# EAGLE board BMP384 Breakout-Panel (EAGLE 9.6.2), part 1 of 3
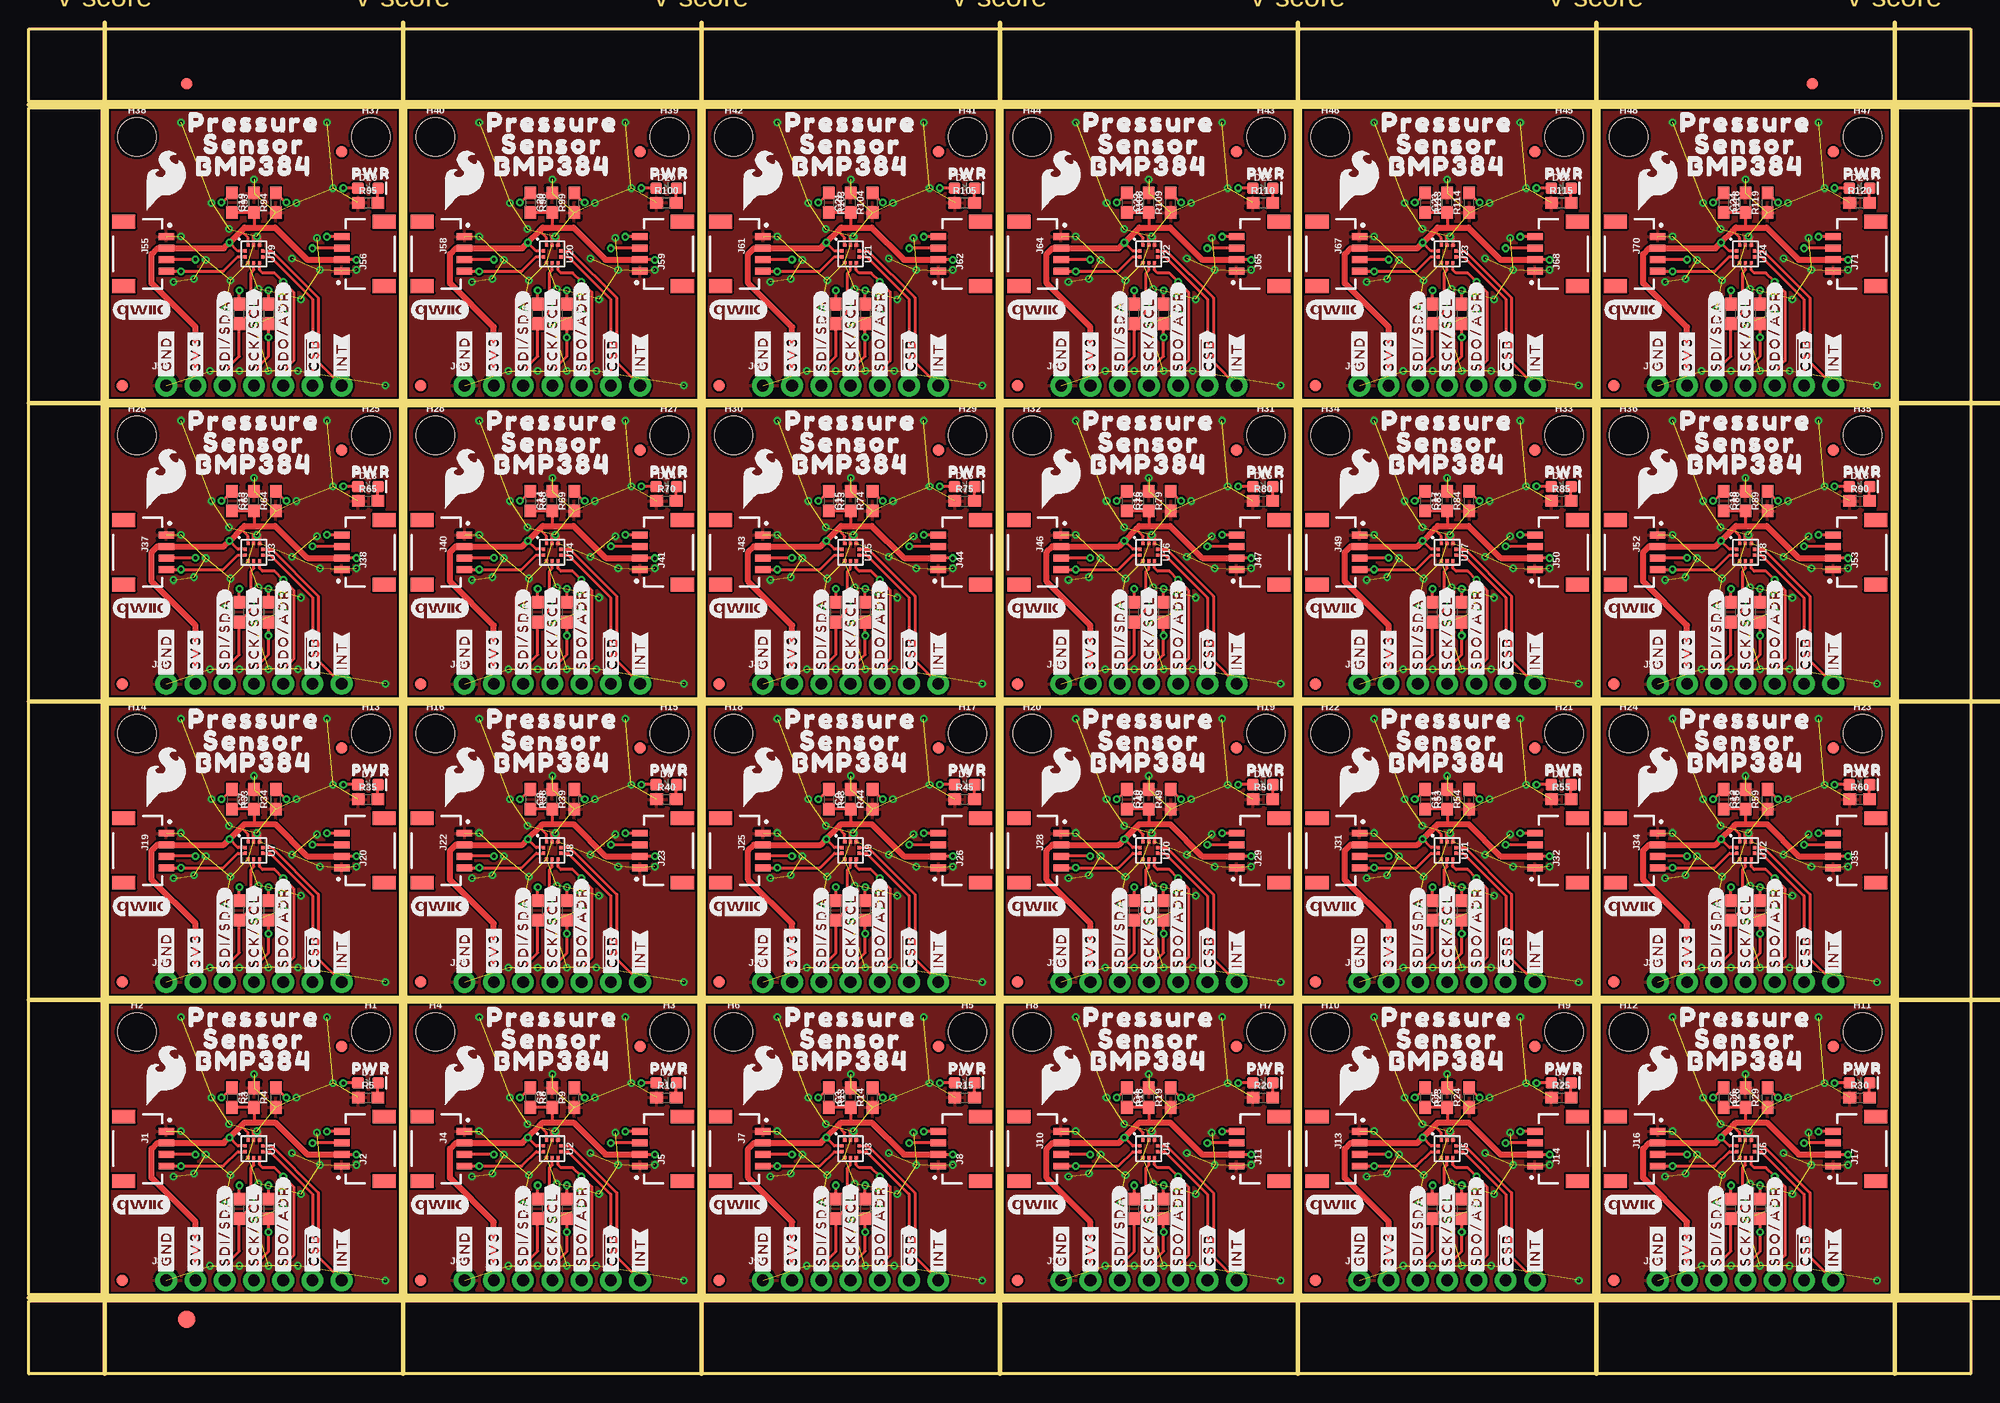
[diagram p0: board, top side]
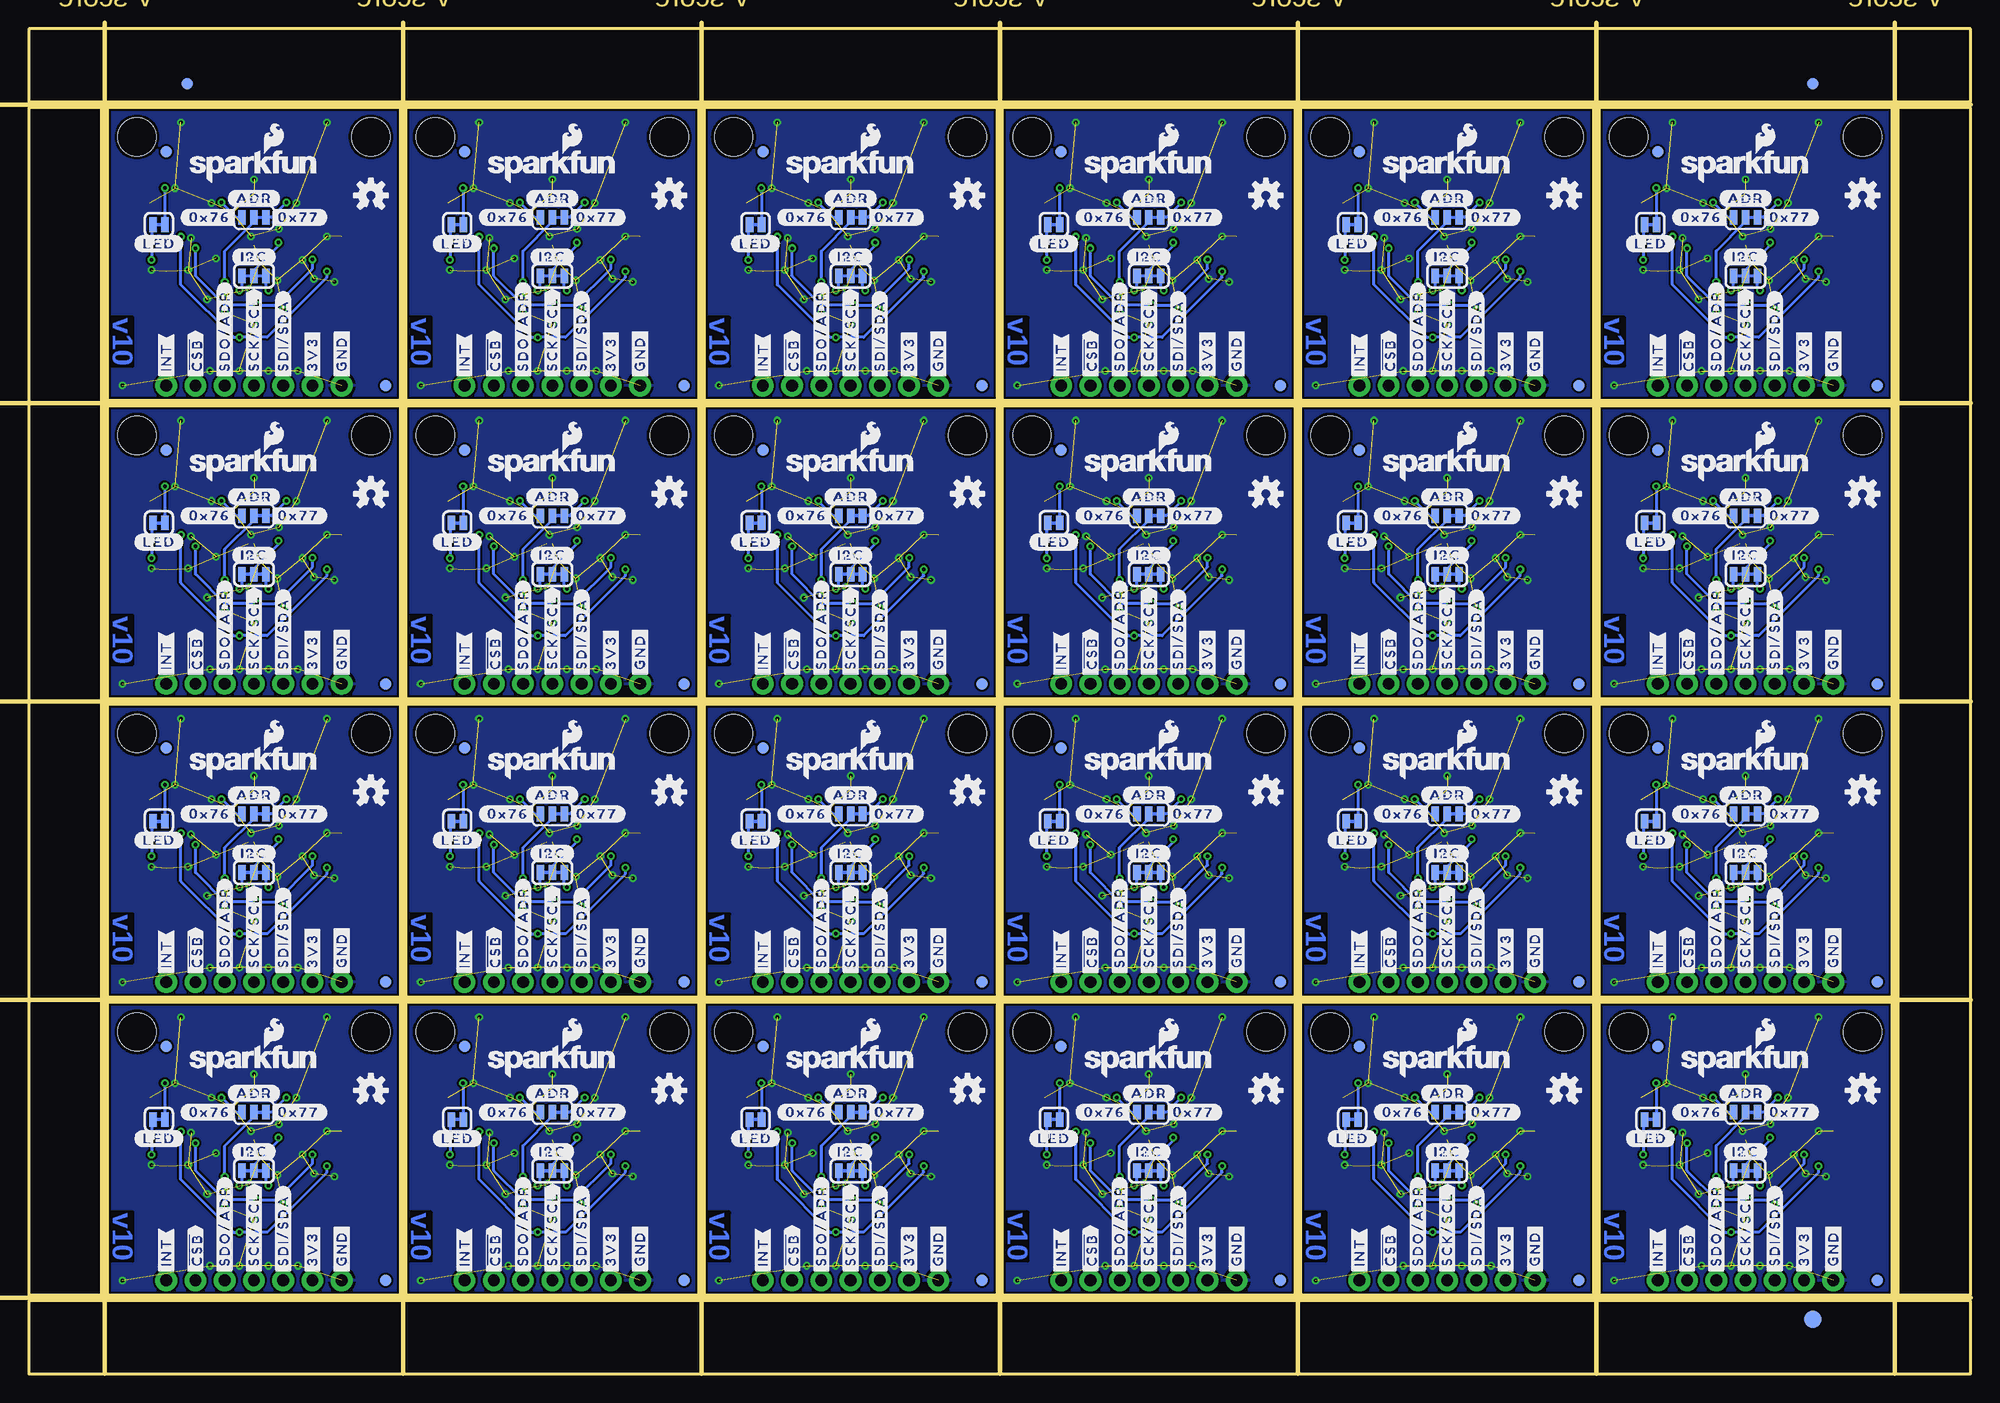
[diagram p1: board, bottom side, seen from below]

Size 168.66 x 116.84 mm. Coordinates in mm from the lower left corner, seen from the top.
Outline: 112 segments
Copper layers (1*16): Top 0.035mm / dielectric 1.5mm / Bottom 0.035mm
Design rules "BMP384 Breakout": minimum track width 7mil, minimum drill 0.3mm, track to track 7mil, track to pad 7mil, pad to pad 7mil, via to via 7mil, smd to smd 7mil, copper to edge 7mil, drill to drill 7mil, minimum pad ring 7mil, minimum via ring 7mil, stop-mask expansion 3mil, vias tented up to drill 25mil, thermal gap 10mil
tRestrict: area 18.7,18.7 to 18.8,18.9; area 20.3,20.2 to 20.4,20.4; area 19.7,20.2 to 19.8,20.4; area 44.6,18.7 to 44.7,18.9; area 46.2,20.2 to 46.4,20.4; area 45.6,20.2 to 45.7,20.4; area 70.5,18.7 to 70.6,18.9; area 72.1,20.2 to 72.3,20.4; area 71.5,20.2 to 71.6,20.4; area 96.4,18.7 to 96.5,18.9; area 98,20.2 to 98.2,20.4; area 97.4,20.2 to 97.5,20.4; 60 more areas
Milling: 12 lines

## Footprints (pad centres in the part's own frame; a part is rotated, then mirrored left to right if it is on the bottom)
0603 = smd 1.1 x 1: 1 -0.85,0; 2 0.85,0
LED-0603 = smd 1 x 1: A -0.877,0; C 0.877,0
FIDUCIAL-1X2 = smd 1 x 1: 1 0,0
FIDUCIAL-1.5X3 = smd 1.5 x 1.5: 1 0,0
STAND-OFF = hole 3.302: 0,0
JST04_1MM_RA = smd 0.6 x 1.35: 1 -1.5,0; 2 -0.5,0; 3 0.5,0; 4 1.5,0 | smd 1.2 x 2: NC1 2.8,-3.675; NC2 -2.8,-3.675
1X07_NO_SILK = drill 1.016 pad 1.88: 1 0,0; 2 2.54,0; 3 5.08,0; 4 7.62,0; 5 10.16,0; 6 12.7,0; 7 15.24,0
SMT-JUMPER_3_1-NC_TRACE_SILK = smd 0.66 x 1.27: 1 -1.041,0; 2 0,0; 3 1.041,0
SMT-JUMPER_3_2-NC_TRACE_SILK = smd 0.66 x 1.27: 1 -1.041,0; 2 0,0; 3 1.041,0
SMT-JUMPER_2_NC_TRACE_SILK = smd 0.66 x 1.27: 1 -0.521,0; 2 0.521,0
LGA-10 = smd 0.285 x 0.27: 1 0.25,0.757; 2 -0.25,0.757; 3 -0.757,0.5; 4 -0.757,0; 5 -0.757,-0.5; 6 -0.25,-0.757; 7 0.25,-0.757; 8 0.757,-0.5; 9 0.757,0; 10 0.757,0.5

## Placement (x,y rotation side)
C1  0.1uF  [0603]  19.56,24 90 top
C2  0.1uF  [0603]  45.47,24 90 top
C3  0.1uF  [0603]  71.37,24 90 top
C4  0.1uF  [0603]  97.28,24 90 top
C5  0.1uF  [0603]  123.19,24 90 top
C6  0.1uF  [0603]  149.1,24 90 top
C7  0.1uF  [0603]  19.56,49.91 90 top
C8  0.1uF  [0603]  45.47,49.91 90 top
C9  0.1uF  [0603]  71.37,49.91 90 top
C10  0.1uF  [0603]  97.28,49.91 90 top
C11  0.1uF  [0603]  123.19,49.91 90 top
C12  0.1uF  [0603]  149.1,49.91 90 top
C13  0.1uF  [0603]  19.56,75.82 90 top
C14  0.1uF  [0603]  45.47,75.82 90 top
C15  0.1uF  [0603]  71.37,75.82 90 top
C16  0.1uF  [0603]  97.28,75.82 90 top
C17  0.1uF  [0603]  123.19,75.82 90 top
C18  0.1uF  [0603]  149.1,75.82 90 top
C19  0.1uF  [0603]  19.56,101.73 90 top
C20  0.1uF  [0603]  45.47,101.73 90 top
C21  0.1uF  [0603]  71.37,101.73 90 top
C22  0.1uF  [0603]  97.28,101.73 90 top
C23  0.1uF  [0603]  123.19,101.73 90 top
C24  0.1uF  [0603]  149.1,101.73 90 top
D1  RED  [LED-0603]  29.46,25.27 0 top
D2  RED  [LED-0603]  55.37,25.27 0 top
D3  RED  [LED-0603]  81.28,25.27 0 top
D4  RED  [LED-0603]  107.19,25.27 0 top
D5  RED  [LED-0603]  133.1,25.27 0 top
D6  RED  [LED-0603]  159,25.27 0 top
D7  RED  [LED-0603]  29.46,51.18 0 top
D8  RED  [LED-0603]  55.37,51.18 0 top
D9  RED  [LED-0603]  81.28,51.18 0 top
D10  RED  [LED-0603]  107.19,51.18 0 top
D11  RED  [LED-0603]  133.1,51.18 0 top
D12  RED  [LED-0603]  159,51.18 0 top
D13  RED  [LED-0603]  29.46,77.09 0 top
D14  RED  [LED-0603]  55.37,77.09 0 top
D15  RED  [LED-0603]  81.28,77.09 0 top
D16  RED  [LED-0603]  107.19,77.09 0 top
D17  RED  [LED-0603]  133.1,77.09 0 top
D18  RED  [LED-0603]  159,77.09 0 top
D19  RED  [LED-0603]  29.46,103 0 top
D20  RED  [LED-0603]  55.37,103 0 top
D21  RED  [LED-0603]  81.28,103 0 top
D22  RED  [LED-0603]  107.19,103 0 top
D23  RED  [LED-0603]  133.1,103 0 top
D24  RED  [LED-0603]  159,103 0 top
E$1  [FIDUCIAL-1X2]  13.72,112.08 0 top
E$2  [FIDUCIAL-1X2]  13.72,112.08 0 bottom
E$3  [FIDUCIAL-1X2]  154.88,112.08 0 top
E$4  [FIDUCIAL-1X2]  154.88,112.08 0 bottom
E$5  [FIDUCIAL-1.5X3]  13.72,4.76 0 top
E$6  [FIDUCIAL-1.5X3]  13.72,4.76 0 bottom
FD1  FIDUCIAL1X2  [FIDUCIAL-1X2]  8.13,8.13 0 top
FD2  FIDUCIAL1X2  [FIDUCIAL-1X2]  8.13,8.13 0 bottom
FD3  FIDUCIAL1X2  [FIDUCIAL-1X2]  27.18,28.45 0 top
FD4  FIDUCIAL1X2  [FIDUCIAL-1X2]  27.18,28.45 0 bottom
FD5  FIDUCIAL1X2  [FIDUCIAL-1X2]  34.04,8.13 0 top
FD6  FIDUCIAL1X2  [FIDUCIAL-1X2]  34.04,8.13 0 bottom
FD7  FIDUCIAL1X2  [FIDUCIAL-1X2]  53.09,28.45 0 top
FD8  FIDUCIAL1X2  [FIDUCIAL-1X2]  53.09,28.45 0 bottom
FD9  FIDUCIAL1X2  [FIDUCIAL-1X2]  59.94,8.13 0 top
FD10  FIDUCIAL1X2  [FIDUCIAL-1X2]  59.94,8.13 0 bottom
FD11  FIDUCIAL1X2  [FIDUCIAL-1X2]  78.99,28.45 0 top
FD12  FIDUCIAL1X2  [FIDUCIAL-1X2]  78.99,28.45 0 bottom
FD13  FIDUCIAL1X2  [FIDUCIAL-1X2]  85.85,8.13 0 top
FD14  FIDUCIAL1X2  [FIDUCIAL-1X2]  85.85,8.13 0 bottom
FD15  FIDUCIAL1X2  [FIDUCIAL-1X2]  104.9,28.45 0 top
FD16  FIDUCIAL1X2  [FIDUCIAL-1X2]  104.9,28.45 0 bottom
FD17  FIDUCIAL1X2  [FIDUCIAL-1X2]  111.76,8.13 0 top
FD18  FIDUCIAL1X2  [FIDUCIAL-1X2]  111.76,8.13 0 bottom
FD19  FIDUCIAL1X2  [FIDUCIAL-1X2]  130.81,28.45 0 top
FD20  FIDUCIAL1X2  [FIDUCIAL-1X2]  130.81,28.45 0 bottom
FD21  FIDUCIAL1X2  [FIDUCIAL-1X2]  137.67,8.13 0 top
FD22  FIDUCIAL1X2  [FIDUCIAL-1X2]  137.67,8.13 0 bottom
FD23  FIDUCIAL1X2  [FIDUCIAL-1X2]  156.72,28.45 0 top
FD24  FIDUCIAL1X2  [FIDUCIAL-1X2]  156.72,28.45 0 bottom
FD25  FIDUCIAL1X2  [FIDUCIAL-1X2]  8.13,34.04 0 top
FD26  FIDUCIAL1X2  [FIDUCIAL-1X2]  8.13,34.04 0 bottom
FD27  FIDUCIAL1X2  [FIDUCIAL-1X2]  27.18,54.36 0 top
FD28  FIDUCIAL1X2  [FIDUCIAL-1X2]  27.18,54.36 0 bottom
FD29  FIDUCIAL1X2  [FIDUCIAL-1X2]  34.04,34.04 0 top
FD30  FIDUCIAL1X2  [FIDUCIAL-1X2]  34.04,34.04 0 bottom
FD31  FIDUCIAL1X2  [FIDUCIAL-1X2]  53.09,54.36 0 top
FD32  FIDUCIAL1X2  [FIDUCIAL-1X2]  53.09,54.36 0 bottom
FD33  FIDUCIAL1X2  [FIDUCIAL-1X2]  59.94,34.04 0 top
FD34  FIDUCIAL1X2  [FIDUCIAL-1X2]  59.94,34.04 0 bottom
FD35  FIDUCIAL1X2  [FIDUCIAL-1X2]  78.99,54.36 0 top
FD36  FIDUCIAL1X2  [FIDUCIAL-1X2]  78.99,54.36 0 bottom
FD37  FIDUCIAL1X2  [FIDUCIAL-1X2]  85.85,34.04 0 top
FD38  FIDUCIAL1X2  [FIDUCIAL-1X2]  85.85,34.04 0 bottom
FD39  FIDUCIAL1X2  [FIDUCIAL-1X2]  104.9,54.36 0 top
FD40  FIDUCIAL1X2  [FIDUCIAL-1X2]  104.9,54.36 0 bottom
FD41  FIDUCIAL1X2  [FIDUCIAL-1X2]  111.76,34.04 0 top
FD42  FIDUCIAL1X2  [FIDUCIAL-1X2]  111.76,34.04 0 bottom
FD43  FIDUCIAL1X2  [FIDUCIAL-1X2]  130.81,54.36 0 top
FD44  FIDUCIAL1X2  [FIDUCIAL-1X2]  130.81,54.36 0 bottom
FD45  FIDUCIAL1X2  [FIDUCIAL-1X2]  137.67,34.04 0 top
FD46  FIDUCIAL1X2  [FIDUCIAL-1X2]  137.67,34.04 0 bottom
FD47  FIDUCIAL1X2  [FIDUCIAL-1X2]  156.72,54.36 0 top
FD48  FIDUCIAL1X2  [FIDUCIAL-1X2]  156.72,54.36 0 bottom
FD49  FIDUCIAL1X2  [FIDUCIAL-1X2]  8.13,59.94 0 top
FD50  FIDUCIAL1X2  [FIDUCIAL-1X2]  8.13,59.94 0 bottom
FD51  FIDUCIAL1X2  [FIDUCIAL-1X2]  27.18,80.26 0 top
FD52  FIDUCIAL1X2  [FIDUCIAL-1X2]  27.18,80.26 0 bottom
FD53  FIDUCIAL1X2  [FIDUCIAL-1X2]  34.04,59.94 0 top
FD54  FIDUCIAL1X2  [FIDUCIAL-1X2]  34.04,59.94 0 bottom
FD55  FIDUCIAL1X2  [FIDUCIAL-1X2]  53.09,80.26 0 top
FD56  FIDUCIAL1X2  [FIDUCIAL-1X2]  53.09,80.26 0 bottom
FD57  FIDUCIAL1X2  [FIDUCIAL-1X2]  59.94,59.94 0 top
FD58  FIDUCIAL1X2  [FIDUCIAL-1X2]  59.94,59.94 0 bottom
FD59  FIDUCIAL1X2  [FIDUCIAL-1X2]  78.99,80.26 0 top
FD60  FIDUCIAL1X2  [FIDUCIAL-1X2]  78.99,80.26 0 bottom
FD61  FIDUCIAL1X2  [FIDUCIAL-1X2]  85.85,59.94 0 top
FD62  FIDUCIAL1X2  [FIDUCIAL-1X2]  85.85,59.94 0 bottom
FD63  FIDUCIAL1X2  [FIDUCIAL-1X2]  104.9,80.26 0 top
FD64  FIDUCIAL1X2  [FIDUCIAL-1X2]  104.9,80.26 0 bottom
FD65  FIDUCIAL1X2  [FIDUCIAL-1X2]  111.76,59.94 0 top
FD66  FIDUCIAL1X2  [FIDUCIAL-1X2]  111.76,59.94 0 bottom
FD67  FIDUCIAL1X2  [FIDUCIAL-1X2]  130.81,80.26 0 top
FD68  FIDUCIAL1X2  [FIDUCIAL-1X2]  130.81,80.26 0 bottom
FD69  FIDUCIAL1X2  [FIDUCIAL-1X2]  137.67,59.94 0 top
FD70  FIDUCIAL1X2  [FIDUCIAL-1X2]  137.67,59.94 0 bottom
FD71  FIDUCIAL1X2  [FIDUCIAL-1X2]  156.72,80.26 0 top
FD72  FIDUCIAL1X2  [FIDUCIAL-1X2]  156.72,80.26 0 bottom
FD73  FIDUCIAL1X2  [FIDUCIAL-1X2]  8.13,85.85 0 top
FD74  FIDUCIAL1X2  [FIDUCIAL-1X2]  8.13,85.85 0 bottom
FD75  FIDUCIAL1X2  [FIDUCIAL-1X2]  27.18,106.17 0 top
FD76  FIDUCIAL1X2  [FIDUCIAL-1X2]  27.18,106.17 0 bottom
FD77  FIDUCIAL1X2  [FIDUCIAL-1X2]  34.04,85.85 0 top
FD78  FIDUCIAL1X2  [FIDUCIAL-1X2]  34.04,85.85 0 bottom
FD79  FIDUCIAL1X2  [FIDUCIAL-1X2]  53.09,106.17 0 top
FD80  FIDUCIAL1X2  [FIDUCIAL-1X2]  53.09,106.17 0 bottom
FD81  FIDUCIAL1X2  [FIDUCIAL-1X2]  59.94,85.85 0 top
FD82  FIDUCIAL1X2  [FIDUCIAL-1X2]  59.94,85.85 0 bottom
FD83  FIDUCIAL1X2  [FIDUCIAL-1X2]  78.99,106.17 0 top
FD84  FIDUCIAL1X2  [FIDUCIAL-1X2]  78.99,106.17 0 bottom
FD85  FIDUCIAL1X2  [FIDUCIAL-1X2]  85.85,85.85 0 top
FD86  FIDUCIAL1X2  [FIDUCIAL-1X2]  85.85,85.85 0 bottom
FD87  FIDUCIAL1X2  [FIDUCIAL-1X2]  104.9,106.17 0 top
FD88  FIDUCIAL1X2  [FIDUCIAL-1X2]  104.9,106.17 0 bottom
FD89  FIDUCIAL1X2  [FIDUCIAL-1X2]  111.76,85.85 0 top
FD90  FIDUCIAL1X2  [FIDUCIAL-1X2]  111.76,85.85 0 bottom
FD91  FIDUCIAL1X2  [FIDUCIAL-1X2]  130.81,106.17 0 top
FD92  FIDUCIAL1X2  [FIDUCIAL-1X2]  130.81,106.17 0 bottom
FD93  FIDUCIAL1X2  [FIDUCIAL-1X2]  137.67,85.85 0 top
FD94  FIDUCIAL1X2  [FIDUCIAL-1X2]  137.67,85.85 0 bottom
FD95  FIDUCIAL1X2  [FIDUCIAL-1X2]  156.72,106.17 0 top
FD96  FIDUCIAL1X2  [FIDUCIAL-1X2]  156.72,106.17 0 bottom
H1  STAND-OFF  [STAND-OFF]  29.72,29.72 0 top
H2  STAND-OFF  [STAND-OFF]  9.4,29.72 0 top
H3  STAND-OFF  [STAND-OFF]  55.63,29.72 0 top
H4  STAND-OFF  [STAND-OFF]  35.31,29.72 0 top
H5  STAND-OFF  [STAND-OFF]  81.53,29.72 0 top
H6  STAND-OFF  [STAND-OFF]  61.21,29.72 0 top
H7  STAND-OFF  [STAND-OFF]  107.44,29.72 0 top
H8  STAND-OFF  [STAND-OFF]  87.12,29.72 0 top
H9  STAND-OFF  [STAND-OFF]  133.35,29.72 0 top
H10  STAND-OFF  [STAND-OFF]  113.03,29.72 0 top
H11  STAND-OFF  [STAND-OFF]  159.26,29.72 0 top
H12  STAND-OFF  [STAND-OFF]  138.94,29.72 0 top
H13  STAND-OFF  [STAND-OFF]  29.72,55.63 0 top
H14  STAND-OFF  [STAND-OFF]  9.4,55.63 0 top
H15  STAND-OFF  [STAND-OFF]  55.63,55.63 0 top
H16  STAND-OFF  [STAND-OFF]  35.31,55.63 0 top
H17  STAND-OFF  [STAND-OFF]  81.53,55.63 0 top
H18  STAND-OFF  [STAND-OFF]  61.21,55.63 0 top
H19  STAND-OFF  [STAND-OFF]  107.44,55.63 0 top
H20  STAND-OFF  [STAND-OFF]  87.12,55.63 0 top
H21  STAND-OFF  [STAND-OFF]  133.35,55.63 0 top
H22  STAND-OFF  [STAND-OFF]  113.03,55.63 0 top
H23  STAND-OFF  [STAND-OFF]  159.26,55.63 0 top
H24  STAND-OFF  [STAND-OFF]  138.94,55.63 0 top
H25  STAND-OFF  [STAND-OFF]  29.72,81.53 0 top
H26  STAND-OFF  [STAND-OFF]  9.4,81.53 0 top
H27  STAND-OFF  [STAND-OFF]  55.63,81.53 0 top
H28  STAND-OFF  [STAND-OFF]  35.31,81.53 0 top
H29  STAND-OFF  [STAND-OFF]  81.53,81.53 0 top
H30  STAND-OFF  [STAND-OFF]  61.21,81.53 0 top
H31  STAND-OFF  [STAND-OFF]  107.44,81.53 0 top
H32  STAND-OFF  [STAND-OFF]  87.12,81.53 0 top
H33  STAND-OFF  [STAND-OFF]  133.35,81.53 0 top
H34  STAND-OFF  [STAND-OFF]  113.03,81.53 0 top
H35  STAND-OFF  [STAND-OFF]  159.26,81.53 0 top
H36  STAND-OFF  [STAND-OFF]  138.94,81.53 0 top
H37  STAND-OFF  [STAND-OFF]  29.72,107.44 0 top
H38  STAND-OFF  [STAND-OFF]  9.4,107.44 0 top
H39  STAND-OFF  [STAND-OFF]  55.63,107.44 0 top
H40  STAND-OFF  [STAND-OFF]  35.31,107.44 0 top
H41  STAND-OFF  [STAND-OFF]  81.53,107.44 0 top
H42  STAND-OFF  [STAND-OFF]  61.21,107.44 0 top
H43  STAND-OFF  [STAND-OFF]  107.44,107.44 0 top
H44  STAND-OFF  [STAND-OFF]  87.12,107.44 0 top
H45  STAND-OFF  [STAND-OFF]  133.35,107.44 0 top
H46  STAND-OFF  [STAND-OFF]  113.03,107.44 0 top
H47  STAND-OFF  [STAND-OFF]  159.26,107.44 0 top
H48  STAND-OFF  [STAND-OFF]  138.94,107.44 0 top
J1  QWIIC_RIGHT_ANGLE  [JST04_1MM_RA]  11.94,19.56 270 top
J2  QWIIC_RIGHT_ANGLE  [JST04_1MM_RA]  27.18,19.56 90 top
J3  [1X07_NO_SILK]  11.94,8.13 0 top
J4  QWIIC_RIGHT_ANGLE  [JST04_1MM_RA]  37.85,19.56 270 top
J5  QWIIC_RIGHT_ANGLE  [JST04_1MM_RA]  53.09,19.56 90 top
J6  [1X07_NO_SILK]  37.85,8.13 0 top
J7  QWIIC_RIGHT_ANGLE  [JST04_1MM_RA]  63.75,19.56 270 top
J8  QWIIC_RIGHT_ANGLE  [JST04_1MM_RA]  78.99,19.56 90 top
J9  [1X07_NO_SILK]  63.75,8.13 0 top
J10  QWIIC_RIGHT_ANGLE  [JST04_1MM_RA]  89.66,19.56 270 top
J11  QWIIC_RIGHT_ANGLE  [JST04_1MM_RA]  104.9,19.56 90 top
J12  [1X07_NO_SILK]  89.66,8.13 0 top
J13  QWIIC_RIGHT_ANGLE  [JST04_1MM_RA]  115.57,19.56 270 top
J14  QWIIC_RIGHT_ANGLE  [JST04_1MM_RA]  130.81,19.56 90 top
J15  [1X07_NO_SILK]  115.57,8.13 0 top
J16  QWIIC_RIGHT_ANGLE  [JST04_1MM_RA]  141.48,19.56 270 top
J17  QWIIC_RIGHT_ANGLE  [JST04_1MM_RA]  156.72,19.56 90 top
J18  [1X07_NO_SILK]  141.48,8.13 0 top
J19  QWIIC_RIGHT_ANGLE  [JST04_1MM_RA]  11.94,45.47 270 top
J20  QWIIC_RIGHT_ANGLE  [JST04_1MM_RA]  27.18,45.47 90 top
J21  [1X07_NO_SILK]  11.94,34.04 0 top
J22  QWIIC_RIGHT_ANGLE  [JST04_1MM_RA]  37.85,45.47 270 top
J23  QWIIC_RIGHT_ANGLE  [JST04_1MM_RA]  53.09,45.47 90 top
J24  [1X07_NO_SILK]  37.85,34.04 0 top
J25  QWIIC_RIGHT_ANGLE  [JST04_1MM_RA]  63.75,45.47 270 top
J26  QWIIC_RIGHT_ANGLE  [JST04_1MM_RA]  78.99,45.47 90 top
J27  [1X07_NO_SILK]  63.75,34.04 0 top
J28  QWIIC_RIGHT_ANGLE  [JST04_1MM_RA]  89.66,45.47 270 top
J29  QWIIC_RIGHT_ANGLE  [JST04_1MM_RA]  104.9,45.47 90 top
J30  [1X07_NO_SILK]  89.66,34.04 0 top
J31  QWIIC_RIGHT_ANGLE  [JST04_1MM_RA]  115.57,45.47 270 top
J32  QWIIC_RIGHT_ANGLE  [JST04_1MM_RA]  130.81,45.47 90 top
J33  [1X07_NO_SILK]  115.57,34.04 0 top
J34  QWIIC_RIGHT_ANGLE  [JST04_1MM_RA]  141.48,45.47 270 top
J35  QWIIC_RIGHT_ANGLE  [JST04_1MM_RA]  156.72,45.47 90 top
J36  [1X07_NO_SILK]  141.48,34.04 0 top
J37  QWIIC_RIGHT_ANGLE  [JST04_1MM_RA]  11.94,71.37 270 top
J38  QWIIC_RIGHT_ANGLE  [JST04_1MM_RA]  27.18,71.37 90 top
J39  [1X07_NO_SILK]  11.94,59.94 0 top
J40  QWIIC_RIGHT_ANGLE  [JST04_1MM_RA]  37.85,71.37 270 top
J41  QWIIC_RIGHT_ANGLE  [JST04_1MM_RA]  53.09,71.37 90 top
J42  [1X07_NO_SILK]  37.85,59.94 0 top
J43  QWIIC_RIGHT_ANGLE  [JST04_1MM_RA]  63.75,71.37 270 top
J44  QWIIC_RIGHT_ANGLE  [JST04_1MM_RA]  78.99,71.37 90 top
J45  [1X07_NO_SILK]  63.75,59.94 0 top
J46  QWIIC_RIGHT_ANGLE  [JST04_1MM_RA]  89.66,71.37 270 top
J47  QWIIC_RIGHT_ANGLE  [JST04_1MM_RA]  104.9,71.37 90 top
J48  [1X07_NO_SILK]  89.66,59.94 0 top
J49  QWIIC_RIGHT_ANGLE  [JST04_1MM_RA]  115.57,71.37 270 top
J50  QWIIC_RIGHT_ANGLE  [JST04_1MM_RA]  130.81,71.37 90 top
J51  [1X07_NO_SILK]  115.57,59.94 0 top
J52  QWIIC_RIGHT_ANGLE  [JST04_1MM_RA]  141.48,71.37 270 top
J53  QWIIC_RIGHT_ANGLE  [JST04_1MM_RA]  156.72,71.37 90 top
J54  [1X07_NO_SILK]  141.48,59.94 0 top
J55  QWIIC_RIGHT_ANGLE  [JST04_1MM_RA]  11.94,97.28 270 top
J56  QWIIC_RIGHT_ANGLE  [JST04_1MM_RA]  27.18,97.28 90 top
J57  [1X07_NO_SILK]  11.94,85.85 0 top
J58  QWIIC_RIGHT_ANGLE  [JST04_1MM_RA]  37.85,97.28 270 top
J59  QWIIC_RIGHT_ANGLE  [JST04_1MM_RA]  53.09,97.28 90 top
J60  [1X07_NO_SILK]  37.85,85.85 0 top
J61  QWIIC_RIGHT_ANGLE  [JST04_1MM_RA]  63.75,97.28 270 top
J62  QWIIC_RIGHT_ANGLE  [JST04_1MM_RA]  78.99,97.28 90 top
J63  [1X07_NO_SILK]  63.75,85.85 0 top
J64  QWIIC_RIGHT_ANGLE  [JST04_1MM_RA]  89.66,97.28 270 top
J65  QWIIC_RIGHT_ANGLE  [JST04_1MM_RA]  104.9,97.28 90 top
J66  [1X07_NO_SILK]  89.66,85.85 0 top
J67  QWIIC_RIGHT_ANGLE  [JST04_1MM_RA]  115.57,97.28 270 top
J68  QWIIC_RIGHT_ANGLE  [JST04_1MM_RA]  130.81,97.28 90 top
J69  [1X07_NO_SILK]  115.57,85.85 0 top
J70  QWIIC_RIGHT_ANGLE  [JST04_1MM_RA]  141.48,97.28 270 top
J71  QWIIC_RIGHT_ANGLE  [JST04_1MM_RA]  156.72,97.28 90 top
J72  [1X07_NO_SILK]  141.48,85.85 0 top
JP1  ADR  [SMT-JUMPER_3_1-NC_TRACE_SILK]  19.56,22.73 0 bottom
JP2  I2C  [SMT-JUMPER_3_2-NC_TRACE_SILK]  19.56,17.65 0 bottom
JP3  LED  [SMT-JUMPER_2_NC_TRACE_SILK]  27.81,22.1 180 bottom
JP4  ADR  [SMT-JUMPER_3_1-NC_TRACE_SILK]  45.47,22.73 0 bottom
JP5  I2C  [SMT-JUMPER_3_2-NC_TRACE_SILK]  45.47,17.65 0 bottom
JP6  LED  [SMT-JUMPER_2_NC_TRACE_SILK]  53.72,22.1 180 bottom
JP7  ADR  [SMT-JUMPER_3_1-NC_TRACE_SILK]  71.37,22.73 0 bottom
JP8  I2C  [SMT-JUMPER_3_2-NC_TRACE_SILK]  71.37,17.65 0 bottom
JP9  LED  [SMT-JUMPER_2_NC_TRACE_SILK]  79.63,22.1 180 bottom
JP10  ADR  [SMT-JUMPER_3_1-NC_TRACE_SILK]  97.28,22.73 0 bottom
JP11  I2C  [SMT-JUMPER_3_2-NC_TRACE_SILK]  97.28,17.65 0 bottom
JP12  LED  [SMT-JUMPER_2_NC_TRACE_SILK]  105.54,22.1 180 bottom
JP13  ADR  [SMT-JUMPER_3_1-NC_TRACE_SILK]  123.19,22.73 0 bottom
JP14  I2C  [SMT-JUMPER_3_2-NC_TRACE_SILK]  123.19,17.65 0 bottom
JP15  LED  [SMT-JUMPER_2_NC_TRACE_SILK]  131.44,22.1 180 bottom
JP16  ADR  [SMT-JUMPER_3_1-NC_TRACE_SILK]  149.1,22.73 0 bottom
JP17  I2C  [SMT-JUMPER_3_2-NC_TRACE_SILK]  149.1,17.65 0 bottom
JP18  LED  [SMT-JUMPER_2_NC_TRACE_SILK]  157.35,22.1 180 bottom
JP19  ADR  [SMT-JUMPER_3_1-NC_TRACE_SILK]  19.56,48.64 0 bottom
JP20  I2C  [SMT-JUMPER_3_2-NC_TRACE_SILK]  19.56,43.56 0 bottom
JP21  LED  [SMT-JUMPER_2_NC_TRACE_SILK]  27.81,48.01 180 bottom
JP22  ADR  [SMT-JUMPER_3_1-NC_TRACE_SILK]  45.47,48.64 0 bottom
JP23  I2C  [SMT-JUMPER_3_2-NC_TRACE_SILK]  45.47,43.56 0 bottom
JP24  LED  [SMT-JUMPER_2_NC_TRACE_SILK]  53.72,48.01 180 bottom
JP25  ADR  [SMT-JUMPER_3_1-NC_TRACE_SILK]  71.37,48.64 0 bottom
JP26  I2C  [SMT-JUMPER_3_2-NC_TRACE_SILK]  71.37,43.56 0 bottom
JP27  LED  [SMT-JUMPER_2_NC_TRACE_SILK]  79.63,48.01 180 bottom
JP28  ADR  [SMT-JUMPER_3_1-NC_TRACE_SILK]  97.28,48.64 0 bottom
JP29  I2C  [SMT-JUMPER_3_2-NC_TRACE_SILK]  97.28,43.56 0 bottom
JP30  LED  [SMT-JUMPER_2_NC_TRACE_SILK]  105.54,48.01 180 bottom
JP31  ADR  [SMT-JUMPER_3_1-NC_TRACE_SILK]  123.19,48.64 0 bottom
JP32  I2C  [SMT-JUMPER_3_2-NC_TRACE_SILK]  123.19,43.56 0 bottom
JP33  LED  [SMT-JUMPER_2_NC_TRACE_SILK]  131.44,48.01 180 bottom
JP34  ADR  [SMT-JUMPER_3_1-NC_TRACE_SILK]  149.1,48.64 0 bottom
JP35  I2C  [SMT-JUMPER_3_2-NC_TRACE_SILK]  149.1,43.56 0 bottom
JP36  LED  [SMT-JUMPER_2_NC_TRACE_SILK]  157.35,48.01 180 bottom
JP37  ADR  [SMT-JUMPER_3_1-NC_TRACE_SILK]  19.56,74.55 0 bottom
JP38  I2C  [SMT-JUMPER_3_2-NC_TRACE_SILK]  19.56,69.47 0 bottom
JP39  LED  [SMT-JUMPER_2_NC_TRACE_SILK]  27.81,73.91 180 bottom
JP40  ADR  [SMT-JUMPER_3_1-NC_TRACE_SILK]  45.47,74.55 0 bottom
JP41  I2C  [SMT-JUMPER_3_2-NC_TRACE_SILK]  45.47,69.47 0 bottom
JP42  LED  [SMT-JUMPER_2_NC_TRACE_SILK]  53.72,73.91 180 bottom
JP43  ADR  [SMT-JUMPER_3_1-NC_TRACE_SILK]  71.37,74.55 0 bottom
JP44  I2C  [SMT-JUMPER_3_2-NC_TRACE_SILK]  71.37,69.47 0 bottom
JP45  LED  [SMT-JUMPER_2_NC_TRACE_SILK]  79.63,73.91 180 bottom
JP46  ADR  [SMT-JUMPER_3_1-NC_TRACE_SILK]  97.28,74.55 0 bottom
JP47  I2C  [SMT-JUMPER_3_2-NC_TRACE_SILK]  97.28,69.47 0 bottom
JP48  LED  [SMT-JUMPER_2_NC_TRACE_SILK]  105.54,73.91 180 bottom
JP49  ADR  [SMT-JUMPER_3_1-NC_TRACE_SILK]  123.19,74.55 0 bottom
JP50  I2C  [SMT-JUMPER_3_2-NC_TRACE_SILK]  123.19,69.47 0 bottom
JP51  LED  [SMT-JUMPER_2_NC_TRACE_SILK]  131.44,73.91 180 bottom
JP52  ADR  [SMT-JUMPER_3_1-NC_TRACE_SILK]  149.1,74.55 0 bottom
JP53  I2C  [SMT-JUMPER_3_2-NC_TRACE_SILK]  149.1,69.47 0 bottom
JP54  LED  [SMT-JUMPER_2_NC_TRACE_SILK]  157.35,73.91 180 bottom
JP55  ADR  [SMT-JUMPER_3_1-NC_TRACE_SILK]  19.56,100.46 0 bottom
JP56  I2C  [SMT-JUMPER_3_2-NC_TRACE_SILK]  19.56,95.38 0 bottom
JP57  LED  [SMT-JUMPER_2_NC_TRACE_SILK]  27.81,99.82 180 bottom
JP58  ADR  [SMT-JUMPER_3_1-NC_TRACE_SILK]  45.47,100.46 0 bottom
JP59  I2C  [SMT-JUMPER_3_2-NC_TRACE_SILK]  45.47,95.38 0 bottom
JP60  LED  [SMT-JUMPER_2_NC_TRACE_SILK]  53.72,99.82 180 bottom
JP61  ADR  [SMT-JUMPER_3_1-NC_TRACE_SILK]  71.37,100.46 0 bottom
JP62  I2C  [SMT-JUMPER_3_2-NC_TRACE_SILK]  71.37,95.38 0 bottom
JP63  LED  [SMT-JUMPER_2_NC_TRACE_SILK]  79.63,99.82 180 bottom
JP64  ADR  [SMT-JUMPER_3_1-NC_TRACE_SILK]  97.28,100.46 0 bottom
JP65  I2C  [SMT-JUMPER_3_2-NC_TRACE_SILK]  97.28,95.38 0 bottom
JP66  LED  [SMT-JUMPER_2_NC_TRACE_SILK]  105.54,99.82 180 bottom
JP67  ADR  [SMT-JUMPER_3_1-NC_TRACE_SILK]  123.19,100.46 0 bottom
JP68  I2C  [SMT-JUMPER_3_2-NC_TRACE_SILK]  123.19,95.38 0 bottom
JP69  LED  [SMT-JUMPER_2_NC_TRACE_SILK]  131.44,99.82 180 bottom
JP70  ADR  [SMT-JUMPER_3_1-NC_TRACE_SILK]  149.1,100.46 0 bottom
JP71  I2C  [SMT-JUMPER_3_2-NC_TRACE_SILK]  149.1,95.38 0 bottom
JP72  LED  [SMT-JUMPER_2_NC_TRACE_SILK]  157.35,99.82 180 bottom
LOGO1  OSHW-LOGOS  [OSHW-LOGO-S]  9.4,24.64 0 bottom
LOGO2  SFE_LOGO_FLAME.2_INCH  [SFE_LOGO_FLAME_.2]  11.94,25.91 0 top
LOGO3  QWIIC_LOGO_5MM  [QWIIC_5MM]  9.78,14.73 0 top
LOGO4  SFE_LOGO_NAME_FLAME.1_INCH  [SFE_LOGO_NAME_FLAME_.1]  19.56,27.18 0 bottom
LOGO5  OSHW-LOGOS  [OSHW-LOGO-S]  35.31,24.64 0 bottom
LOGO6  QWIIC_LOGO_5MM  [QWIIC_5MM]  35.69,14.73 0 top
LOGO7  SFE_LOGO_FLAME.2_INCH  [SFE_LOGO_FLAME_.2]  37.85,25.91 0 top
LOGO8  SFE_LOGO_NAME_FLAME.1_INCH  [SFE_LOGO_NAME_FLAME_.1]  45.47,27.18 0 bottom
LOGO9  OSHW-LOGOS  [OSHW-LOGO-S]  61.21,24.64 0 bottom
LOGO10  QWIIC_LOGO_5MM  [QWIIC_5MM]  61.59,14.73 0 top
LOGO11  SFE_LOGO_FLAME.2_INCH  [SFE_LOGO_FLAME_.2]  63.75,25.91 0 top
LOGO12  SFE_LOGO_NAME_FLAME.1_INCH  [SFE_LOGO_NAME_FLAME_.1]  71.37,27.18 0 bottom
LOGO13  OSHW-LOGOS  [OSHW-LOGO-S]  87.12,24.64 0 bottom
LOGO14  QWIIC_LOGO_5MM  [QWIIC_5MM]  87.5,14.73 0 top
LOGO15  SFE_LOGO_FLAME.2_INCH  [SFE_LOGO_FLAME_.2]  89.66,25.91 0 top
LOGO16  SFE_LOGO_NAME_FLAME.1_INCH  [SFE_LOGO_NAME_FLAME_.1]  97.28,27.18 0 bottom
LOGO17  OSHW-LOGOS  [OSHW-LOGO-S]  113.03,24.64 0 bottom
LOGO18  QWIIC_LOGO_5MM  [QWIIC_5MM]  113.41,14.73 0 top
LOGO19  SFE_LOGO_FLAME.2_INCH  [SFE_LOGO_FLAME_.2]  115.57,25.91 0 top
LOGO20  SFE_LOGO_NAME_FLAME.1_INCH  [SFE_LOGO_NAME_FLAME_.1]  123.19,27.18 0 bottom
LOGO21  OSHW-LOGOS  [OSHW-LOGO-S]  138.94,24.64 0 bottom
LOGO22  QWIIC_LOGO_5MM  [QWIIC_5MM]  139.32,14.73 0 top
LOGO23  SFE_LOGO_FLAME.2_INCH  [SFE_LOGO_FLAME_.2]  141.48,25.91 0 top
LOGO24  SFE_LOGO_NAME_FLAME.1_INCH  [SFE_LOGO_NAME_FLAME_.1]  149.1,27.18 0 bottom
LOGO25  OSHW-LOGOS  [OSHW-LOGO-S]  9.4,50.55 0 bottom
LOGO26  QWIIC_LOGO_5MM  [QWIIC_5MM]  9.78,40.64 0 top
LOGO27  SFE_LOGO_FLAME.2_INCH  [SFE_LOGO_FLAME_.2]  11.94,51.82 0 top
LOGO28  SFE_LOGO_NAME_FLAME.1_INCH  [SFE_LOGO_NAME_FLAME_.1]  19.56,53.09 0 bottom
LOGO29  OSHW-LOGOS  [OSHW-LOGO-S]  35.31,50.55 0 bottom
LOGO30  QWIIC_LOGO_5MM  [QWIIC_5MM]  35.69,40.64 0 top
LOGO31  SFE_LOGO_FLAME.2_INCH  [SFE_LOGO_FLAME_.2]  37.85,51.82 0 top
LOGO32  SFE_LOGO_NAME_FLAME.1_INCH  [SFE_LOGO_NAME_FLAME_.1]  45.47,53.09 0 bottom
LOGO33  OSHW-LOGOS  [OSHW-LOGO-S]  61.21,50.55 0 bottom
LOGO34  QWIIC_LOGO_5MM  [QWIIC_5MM]  61.59,40.64 0 top
LOGO35  SFE_LOGO_FLAME.2_INCH  [SFE_LOGO_FLAME_.2]  63.75,51.82 0 top
LOGO36  SFE_LOGO_NAME_FLAME.1_INCH  [SFE_LOGO_NAME_FLAME_.1]  71.37,53.09 0 bottom
LOGO37  OSHW-LOGOS  [OSHW-LOGO-S]  87.12,50.55 0 bottom
LOGO38  QWIIC_LOGO_5MM  [QWIIC_5MM]  87.5,40.64 0 top
LOGO39  SFE_LOGO_FLAME.2_INCH  [SFE_LOGO_FLAME_.2]  89.66,51.82 0 top
LOGO40  SFE_LOGO_NAME_FLAME.1_INCH  [SFE_LOGO_NAME_FLAME_.1]  97.28,53.09 0 bottom
LOGO41  OSHW-LOGOS  [OSHW-LOGO-S]  113.03,50.55 0 bottom
LOGO42  QWIIC_LOGO_5MM  [QWIIC_5MM]  113.41,40.64 0 top
LOGO43  SFE_LOGO_FLAME.2_INCH  [SFE_LOGO_FLAME_.2]  115.57,51.82 0 top
LOGO44  SFE_LOGO_NAME_FLAME.1_INCH  [SFE_LOGO_NAME_FLAME_.1]  123.19,53.09 0 bottom
LOGO45  OSHW-LOGOS  [OSHW-LOGO-S]  138.94,50.55 0 bottom
LOGO46  QWIIC_LOGO_5MM  [QWIIC_5MM]  139.32,40.64 0 top
LOGO47  SFE_LOGO_FLAME.2_INCH  [SFE_LOGO_FLAME_.2]  141.48,51.82 0 top
LOGO48  SFE_LOGO_NAME_FLAME.1_INCH  [SFE_LOGO_NAME_FLAME_.1]  149.1,53.09 0 bottom
LOGO49  OSHW-LOGOS  [OSHW-LOGO-S]  9.4,76.45 0 bottom
LOGO50  QWIIC_LOGO_5MM  [QWIIC_5MM]  9.78,66.55 0 top
LOGO51  SFE_LOGO_FLAME.2_INCH  [SFE_LOGO_FLAME_.2]  11.94,77.72 0 top
LOGO52  SFE_LOGO_NAME_FLAME.1_INCH  [SFE_LOGO_NAME_FLAME_.1]  19.56,78.99 0 bottom
LOGO53  OSHW-LOGOS  [OSHW-LOGO-S]  35.31,76.45 0 bottom
LOGO54  QWIIC_LOGO_5MM  [QWIIC_5MM]  35.69,66.55 0 top
LOGO55  SFE_LOGO_FLAME.2_INCH  [SFE_LOGO_FLAME_.2]  37.85,77.72 0 top
LOGO56  SFE_LOGO_NAME_FLAME.1_INCH  [SFE_LOGO_NAME_FLAME_.1]  45.47,78.99 0 bottom
LOGO57  OSHW-LOGOS  [OSHW-LOGO-S]  61.21,76.45 0 bottom
LOGO58  QWIIC_LOGO_5MM  [QWIIC_5MM]  61.59,66.55 0 top
LOGO59  SFE_LOGO_FLAME.2_INCH  [SFE_LOGO_FLAME_.2]  63.75,77.72 0 top
LOGO60  SFE_LOGO_NAME_FLAME.1_INCH  [SFE_LOGO_NAME_FLAME_.1]  71.37,78.99 0 bottom
LOGO61  OSHW-LOGOS  [OSHW-LOGO-S]  87.12,76.45 0 bottom
LOGO62  QWIIC_LOGO_5MM  [QWIIC_5MM]  87.5,66.55 0 top
LOGO63  SFE_LOGO_FLAME.2_INCH  [SFE_LOGO_FLAME_.2]  89.66,77.72 0 top
LOGO64  SFE_LOGO_NAME_FLAME.1_INCH  [SFE_LOGO_NAME_FLAME_.1]  97.28,78.99 0 bottom
LOGO65  OSHW-LOGOS  [OSHW-LOGO-S]  113.03,76.45 0 bottom
LOGO66  QWIIC_LOGO_5MM  [QWIIC_5MM]  113.41,66.55 0 top
LOGO67  SFE_LOGO_FLAME.2_INCH  [SFE_LOGO_FLAME_.2]  115.57,77.72 0 top
LOGO68  SFE_LOGO_NAME_FLAME.1_INCH  [SFE_LOGO_NAME_FLAME_.1]  123.19,78.99 0 bottom
LOGO69  OSHW-LOGOS  [OSHW-LOGO-S]  138.94,76.45 0 bottom
LOGO70  QWIIC_LOGO_5MM  [QWIIC_5MM]  139.32,66.55 0 top
LOGO71  SFE_LOGO_FLAME.2_INCH  [SFE_LOGO_FLAME_.2]  141.48,77.72 0 top
LOGO72  SFE_LOGO_NAME_FLAME.1_INCH  [SFE_LOGO_NAME_FLAME_.1]  149.1,78.99 0 bottom
LOGO73  OSHW-LOGOS  [OSHW-LOGO-S]  9.4,102.36 0 bottom
LOGO74  QWIIC_LOGO_5MM  [QWIIC_5MM]  9.78,92.46 0 top
LOGO75  SFE_LOGO_FLAME.2_INCH  [SFE_LOGO_FLAME_.2]  11.94,103.63 0 top
LOGO76  SFE_LOGO_NAME_FLAME.1_INCH  [SFE_LOGO_NAME_FLAME_.1]  19.56,104.9 0 bottom
LOGO77  OSHW-LOGOS  [OSHW-LOGO-S]  35.31,102.36 0 bottom
LOGO78  QWIIC_LOGO_5MM  [QWIIC_5MM]  35.69,92.46 0 top
LOGO79  SFE_LOGO_FLAME.2_INCH  [SFE_LOGO_FLAME_.2]  37.85,103.63 0 top
LOGO80  SFE_LOGO_NAME_FLAME.1_INCH  [SFE_LOGO_NAME_FLAME_.1]  45.47,104.9 0 bottom
LOGO81  OSHW-LOGOS  [OSHW-LOGO-S]  61.21,102.36 0 bottom
LOGO82  QWIIC_LOGO_5MM  [QWIIC_5MM]  61.59,92.46 0 top
LOGO83  SFE_LOGO_FLAME.2_INCH  [SFE_LOGO_FLAME_.2]  63.75,103.63 0 top
LOGO84  SFE_LOGO_NAME_FLAME.1_INCH  [SFE_LOGO_NAME_FLAME_.1]  71.37,104.9 0 bottom
LOGO85  OSHW-LOGOS  [OSHW-LOGO-S]  87.12,102.36 0 bottom
LOGO86  QWIIC_LOGO_5MM  [QWIIC_5MM]  87.5,92.46 0 top
LOGO87  SFE_LOGO_FLAME.2_INCH  [SFE_LOGO_FLAME_.2]  89.66,103.63 0 top
LOGO88  SFE_LOGO_NAME_FLAME.1_INCH  [SFE_LOGO_NAME_FLAME_.1]  97.28,104.9 0 bottom
LOGO89  OSHW-LOGOS  [OSHW-LOGO-S]  113.03,102.36 0 bottom
LOGO90  QWIIC_LOGO_5MM  [QWIIC_5MM]  113.41,92.46 0 top
LOGO91  SFE_LOGO_FLAME.2_INCH  [SFE_LOGO_FLAME_.2]  115.57,103.63 0 top
LOGO92  SFE_LOGO_NAME_FLAME.1_INCH  [SFE_LOGO_NAME_FLAME_.1]  123.19,104.9 0 bottom
LOGO93  OSHW-LOGOS  [OSHW-LOGO-S]  138.94,102.36 0 bottom
LOGO94  QWIIC_LOGO_5MM  [QWIIC_5MM]  139.32,92.46 0 top
LOGO95  SFE_LOGO_FLAME.2_INCH  [SFE_LOGO_FLAME_.2]  141.48,103.63 0 top
LOGO96  SFE_LOGO_NAME_FLAME.1_INCH  [SFE_LOGO_NAME_FLAME_.1]  149.1,104.9 0 bottom
R1  2.2k  [0603]  18.29,14.35 90 top
R2  2.2k  [0603]  20.83,14.35 270 top
R3  10k  [0603]  17.65,24 270 top
R4  10k  [0603]  21.46,24 90 top
R5  1k  [0603]  29.46,24 0 top
R6  2.2k  [0603]  44.2,14.35 90 top
R7  2.2k  [0603]  46.74,14.35 270 top
R8  10k  [0603]  43.56,24 270 top
R9  10k  [0603]  47.37,24 90 top
R10  1k  [0603]  55.37,24 0 top
R11  2.2k  [0603]  70.1,14.35 90 top
R12  2.2k  [0603]  72.64,14.35 270 top
R13  10k  [0603]  69.47,24 270 top
R14  10k  [0603]  73.28,24 90 top
R15  1k  [0603]  81.28,24 0 top
R16  2.2k  [0603]  96.01,14.35 90 top
R17  2.2k  [0603]  98.55,14.35 270 top
R18  10k  [0603]  95.38,24 270 top
R19  10k  [0603]  99.19,24 90 top
R20  1k  [0603]  107.19,24 0 top
R21  2.2k  [0603]  121.92,14.35 90 top
R22  2.2k  [0603]  124.46,14.35 270 top
R23  10k  [0603]  121.29,24 270 top
R24  10k  [0603]  125.09,24 90 top
R25  1k  [0603]  133.1,24 0 top
R26  2.2k  [0603]  147.83,14.35 90 top
R27  2.2k  [0603]  150.37,14.35 270 top
R28  10k  [0603]  147.19,24 270 top
R29  10k  [0603]  151,24 90 top
R30  1k  [0603]  159,24 0 top
R31  2.2k  [0603]  18.29,40.26 90 top
R32  2.2k  [0603]  20.83,40.26 270 top
R33  10k  [0603]  17.65,49.91 270 top
R34  10k  [0603]  21.46,49.91 90 top
R35  1k  [0603]  29.46,49.91 0 top
R36  2.2k  [0603]  44.2,40.26 90 top
R37  2.2k  [0603]  46.74,40.26 270 top
R38  10k  [0603]  43.56,49.91 270 top
R39  10k  [0603]  47.37,49.91 90 top
R40  1k  [0603]  55.37,49.91 0 top
R41  2.2k  [0603]  70.1,40.26 90 top
R42  2.2k  [0603]  72.64,40.26 270 top
R43  10k  [0603]  69.47,49.91 270 top
R44  10k  [0603]  73.28,49.91 90 top
R45  1k  [0603]  81.28,49.91 0 top
R46  2.2k  [0603]  96.01,40.26 90 top
R47  2.2k  [0603]  98.55,40.26 270 top
R48  10k  [0603]  95.38,49.91 270 top
R49  10k  [0603]  99.19,49.91 90 top
R50  1k  [0603]  107.19,49.91 0 top
R51  2.2k  [0603]  121.92,40.26 90 top
R52  2.2k  [0603]  124.46,40.26 270 top
R53  10k  [0603]  121.29,49.91 270 top
R54  10k  [0603]  125.09,49.91 90 top
R55  1k  [0603]  133.1,49.91 0 top
R56  2.2k  [0603]  147.83,40.26 90 top
R57  2.2k  [0603]  150.37,40.26 270 top
R58  10k  [0603]  147.19,49.91 270 top
R59  10k  [0603]  151,49.91 90 top
R60  1k  [0603]  159,49.91 0 top
R61  2.2k  [0603]  18.29,66.17 90 top
R62  2.2k  [0603]  20.83,66.17 270 top
R63  10k  [0603]  17.65,75.82 270 top
R64  10k  [0603]  21.46,75.82 90 top
R65  1k  [0603]  29.46,75.82 0 top
R66  2.2k  [0603]  44.2,66.17 90 top
R67  2.2k  [0603]  46.74,66.17 270 top
R68  10k  [0603]  43.56,75.82 270 top
R69  10k  [0603]  47.37,75.82 90 top
R70  1k  [0603]  55.37,75.82 0 top
R71  2.2k  [0603]  70.1,66.17 90 top
R72  2.2k  [0603]  72.64,66.17 270 top
R73  10k  [0603]  69.47,75.82 270 top
R74  10k  [0603]  73.28,75.82 90 top
R75  1k  [0603]  81.28,75.82 0 top
R76  2.2k  [0603]  96.01,66.17 90 top
R77  2.2k  [0603]  98.55,66.17 270 top
R78  10k  [0603]  95.38,75.82 270 top
R79  10k  [0603]  99.19,75.82 90 top
R80  1k  [0603]  107.19,75.82 0 top
R81  2.2k  [0603]  121.92,66.17 90 top
R82  2.2k  [0603]  124.46,66.17 270 top
R83  10k  [0603]  121.29,75.82 270 top
R84  10k  [0603]  125.09,75.82 90 top
R85  1k  [0603]  133.1,75.82 0 top
R86  2.2k  [0603]  147.83,66.17 90 top
R87  2.2k  [0603]  150.37,66.17 270 top
R88  10k  [0603]  147.19,75.82 270 top
R89  10k  [0603]  151,75.82 90 top
R90  1k  [0603]  159,75.82 0 top
R91  2.2k  [0603]  18.29,92.08 90 top
R92  2.2k  [0603]  20.83,92.08 270 top
R93  10k  [0603]  17.65,101.73 270 top
R94  10k  [0603]  21.46,101.73 90 top
R95  1k  [0603]  29.46,101.73 0 top
R96  2.2k  [0603]  44.2,92.08 90 top
R97  2.2k  [0603]  46.74,92.08 270 top
R98  10k  [0603]  43.56,101.73 270 top
R99  10k  [0603]  47.37,101.73 90 top
R100  1k  [0603]  55.37,101.73 0 top
R101  2.2k  [0603]  70.1,92.08 90 top
R102  2.2k  [0603]  72.64,92.08 270 top
R103  10k  [0603]  69.47,101.73 270 top
R104  10k  [0603]  73.28,101.73 90 top
R105  1k  [0603]  81.28,101.73 0 top
R106  2.2k  [0603]  96.01,92.08 90 top
R107  2.2k  [0603]  98.55,92.08 270 top
R108  10k  [0603]  95.38,101.73 270 top
R109  10k  [0603]  99.19,101.73 90 top
R110  1k  [0603]  107.19,101.73 0 top
R111  2.2k  [0603]  121.92,92.08 90 top
R112  2.2k  [0603]  124.46,92.08 270 top
R113  10k  [0603]  121.29,101.73 270 top
R114  10k  [0603]  125.09,101.73 90 top
R115  1k  [0603]  133.1,101.73 0 top
R116  2.2k  [0603]  147.83,92.08 90 top
R117  2.2k  [0603]  150.37,92.08 270 top
R118  10k  [0603]  147.19,101.73 270 top
R119  10k  [0603]  151,101.73 90 top
R120  1k  [0603]  159,101.73 0 top
U1  BMP384  [LGA-10]  19.55,19.56 90 top
U2  BMP384  [LGA-10]  45.46,19.56 90 top
U3  BMP384  [LGA-10]  71.37,19.56 90 top
U4  BMP384  [LGA-10]  97.27,19.56 90 top
U5  BMP384  [LGA-10]  123.18,19.56 90 top
U6  BMP384  [LGA-10]  149.09,19.56 90 top
U7  BMP384  [LGA-10]  19.55,45.47 90 top
U8  BMP384  [LGA-10]  45.46,45.47 90 top
U9  BMP384  [LGA-10]  71.37,45.47 90 top
U10  BMP384  [LGA-10]  97.27,45.47 90 top
U11  BMP384  [LGA-10]  123.18,45.47 90 top
U12  BMP384  [LGA-10]  149.09,45.47 90 top
U13  BMP384  [LGA-10]  19.55,71.38 90 top
U14  BMP384  [LGA-10]  45.46,71.38 90 top
U15  BMP384  [LGA-10]  71.37,71.38 90 top
U16  BMP384  [LGA-10]  97.27,71.38 90 top
U17  BMP384  [LGA-10]  123.18,71.38 90 top
U18  BMP384  [LGA-10]  149.09,71.38 90 top
U19  BMP384  [LGA-10]  19.55,97.29 90 top
U20  BMP384  [LGA-10]  45.46,97.29 90 top
U21  BMP384  [LGA-10]  71.37,97.29 90 top
U22  BMP384  [LGA-10]  97.27,97.29 90 top
U23  BMP384  [LGA-10]  123.18,97.29 90 top
U24  BMP384  [LGA-10]  149.09,97.29 90 top
U$1  [#GND#0]  11.94,8.64 90 top
U$2  [#GND#0]  11.94,8.64 90 bottom
U$3  [#3V3#0]  14.48,8.64 90 bottom
U$4  [#I2C#0]  19.56,19.3 0 bottom
U$5  [#SDI#SDA#0]  17.02,8.64 90 top
U$6  [#SDI#SDA#0]  17.02,8.64 90 bottom
U$7  [#SCK#SCL#0]  19.56,8.64 90 top
U$8  [#SCK#SCL#0]  19.56,8.64 90 bottom
U$9  [#SDO#ADR#0]  22.1,8.64 90 top
U$10  [#SDO#ADR#0]  22.1,8.64 90 bottom
U$11  [#0X76#0]  25.91,22.73 0 bottom
U$12  [#0X77#0]  13.21,22.73 0 bottom
U$13  [#INT#0]  27.18,8.64 90 top
U$14  [#INT#0]  27.18,8.64 90 bottom
U$15  [PWR0]  29.72,26.54 0 top
U$16  [#GND#0]  37.85,8.64 90 top
U$17  [#ADR#0]  19.56,24.38 0 bottom
U$18  [#GND#0]  37.85,8.64 90 bottom
U$19  [#LED#0]  27.81,20.45 0 bottom
U$20  [#3V3#0]  14.48,8.64 90 top
U$21  [PRESSURE0]  19.56,30.99 0 top
U$22  [#SDI#SDA#0]  42.93,8.64 90 top
U$23  [#SDI#SDA#0]  42.93,8.64 90 bottom
U$24  [#SCK#SCL#0]  45.47,8.64 90 top
U$25  [##CSB##0]  24.64,8.64 90 top
U$26  [SENSOR0]  19.56,29.08 0 top
U$27  [BMP3840]  19.56,27.18 0 top
U$28  [##CSB##0]  24.64,8.64 90 bottom
U$29  [#SCK#SCL#0]  45.47,8.64 90 bottom
U$30  [#SDO#ADR#0]  48.01,8.64 90 top
U$31  [#SDO#ADR#0]  48.01,8.64 90 bottom
U$32  [#INT#0]  53.09,8.64 90 top
U$33  [#INT#0]  53.09,8.64 90 bottom
U$34  [#ADR#0]  45.47,24.38 0 bottom
U$35  [PRESSURE0]  45.47,30.99 0 top
U$36  [SENSOR0]  45.47,29.08 0 top
U$37  [BMP3840]  45.47,27.18 0 top
U$38  [#LED#0]  53.72,20.45 0 bottom
U$39  [#3V3#0]  40.39,8.64 90 top
U$40  [#3V3#0]  40.39,8.64 90 bottom
U$41  [##CSB##0]  50.55,8.64 90 top
U$42  [##CSB##0]  50.55,8.64 90 bottom
U$43  [#0X76#0]  51.82,22.73 0 bottom
U$44  [#0X77#0]  39.12,22.73 0 bottom
U$45  [#I2C#0]  45.47,19.3 0 bottom
U$46  [PWR0]  55.63,26.54 0 top
U$47  [#GND#0]  63.75,8.64 90 top
U$48  [#GND#0]  63.75,8.64 90 bottom
U$49  [#SDI#SDA#0]  68.83,8.64 90 top
U$50  [#SDI#SDA#0]  68.83,8.64 90 bottom
U$51  [#SCK#SCL#0]  71.37,8.64 90 top
U$52  [#SCK#SCL#0]  71.37,8.64 90 bottom
U$53  [#SDO#ADR#0]  73.91,8.64 90 top
U$54  [#SDO#ADR#0]  73.91,8.64 90 bottom
U$55  [#INT#0]  78.99,8.64 90 top
U$56  [#INT#0]  78.99,8.64 90 bottom
U$57  [#ADR#0]  71.37,24.38 0 bottom
U$58  [PRESSURE0]  71.37,30.99 0 top
U$59  [SENSOR0]  71.37,29.08 0 top
U$60  [BMP3840]  71.37,27.18 0 top
U$61  [#LED#0]  79.63,20.45 0 bottom
U$62  [#3V3#0]  66.29,8.64 90 top
U$63  [#3V3#0]  66.29,8.64 90 bottom
U$64  [##CSB##0]  76.45,8.64 90 top
U$65  [##CSB##0]  76.45,8.64 90 bottom
U$66  [#0X76#0]  77.72,22.73 0 bottom
U$67  [#0X77#0]  65.02,22.73 0 bottom
U$68  [#I2C#0]  71.37,19.3 0 bottom
U$69  [PWR0]  81.53,26.54 0 top
U$70  [#GND#0]  89.66,8.64 90 top
U$71  [#GND#0]  89.66,8.64 90 bottom
U$72  [#SDI#SDA#0]  94.74,8.64 90 top
U$73  [#SDI#SDA#0]  94.74,8.64 90 bottom
U$74  [#SCK#SCL#0]  97.28,8.64 90 top
U$75  [#SCK#SCL#0]  97.28,8.64 90 bottom
U$76  [#SDO#ADR#0]  99.82,8.64 90 top
U$77  [#SDO#ADR#0]  99.82,8.64 90 bottom
U$78  [#INT#0]  104.9,8.64 90 top
U$79  [#INT#0]  104.9,8.64 90 bottom
U$80  [#ADR#0]  97.28,24.38 0 bottom
U$81  [PRESSURE0]  97.28,30.99 0 top
U$82  [SENSOR0]  97.28,29.08 0 top
U$83  [BMP3840]  97.28,27.18 0 top
U$84  [#LED#0]  105.54,20.45 0 bottom
U$85  [#3V3#0]  92.2,8.64 90 top
U$86  [#3V3#0]  92.2,8.64 90 bottom
U$87  [##CSB##0]  102.36,8.64 90 top
U$88  [##CSB##0]  102.36,8.64 90 bottom
U$89  [#0X76#0]  103.63,22.73 0 bottom
U$90  [#0X77#0]  90.93,22.73 0 bottom
U$91  [#I2C#0]  97.28,19.3 0 bottom
U$92  [PWR0]  107.44,26.54 0 top
U$93  [#GND#0]  115.57,8.64 90 top
U$94  [#GND#0]  115.57,8.64 90 bottom
U$95  [#SDI#SDA#0]  120.65,8.64 90 top
U$96  [#SDI#SDA#0]  120.65,8.64 90 bottom
U$97  [#SCK#SCL#0]  123.19,8.64 90 top
U$98  [#SCK#SCL#0]  123.19,8.64 90 bottom
U$99  [#SDO#ADR#0]  125.73,8.64 90 top
U$100  [#SDO#ADR#0]  125.73,8.64 90 bottom
U$101  [#INT#0]  130.81,8.64 90 top
U$102  [#INT#0]  130.81,8.64 90 bottom
U$103  [#ADR#0]  123.19,24.38 0 bottom
U$104  [PRESSURE0]  123.19,30.99 0 top
U$105  [SENSOR0]  123.19,29.08 0 top
U$106  [BMP3840]  123.19,27.18 0 top
U$107  [#LED#0]  131.44,20.45 0 bottom
U$108  [#3V3#0]  118.11,8.64 90 top
U$109  [#3V3#0]  118.11,8.64 90 bottom
U$110  [##CSB##0]  128.27,8.64 90 top
U$111  [##CSB##0]  128.27,8.64 90 bottom
U$112  [#0X76#0]  129.54,22.73 0 bottom
U$113  [#0X77#0]  116.84,22.73 0 bottom
U$114  [#I2C#0]  123.19,19.3 0 bottom
U$115  [PWR0]  133.35,26.54 0 top
U$116  [#GND#0]  141.48,8.64 90 top
U$117  [#GND#0]  141.48,8.64 90 bottom
U$118  [#SDI#SDA#0]  146.56,8.64 90 top
U$119  [#SDI#SDA#0]  146.56,8.64 90 bottom
U$120  [#SCK#SCL#0]  149.1,8.64 90 top
U$121  [#SCK#SCL#0]  149.1,8.64 90 bottom
U$122  [#SDO#ADR#0]  151.64,8.64 90 top
U$123  [#SDO#ADR#0]  151.64,8.64 90 bottom
U$124  [#INT#0]  156.72,8.64 90 top
U$125  [#INT#0]  156.72,8.64 90 bottom
U$126  [#ADR#0]  149.1,24.38 0 bottom
U$127  [PRESSURE0]  149.1,30.99 0 top
U$128  [SENSOR0]  149.1,29.08 0 top
U$129  [BMP3840]  149.1,27.18 0 top
U$130  [#LED#0]  157.35,20.45 0 bottom
U$131  [#3V3#0]  144.02,8.64 90 top
U$132  [#3V3#0]  144.02,8.64 90 bottom
U$133  [##CSB##0]  154.18,8.64 90 top
U$134  [##CSB##0]  154.18,8.64 90 bottom
U$135  [#0X76#0]  155.45,22.73 0 bottom
U$136  [#0X77#0]  142.75,22.73 0 bottom
U$137  [#I2C#0]  149.1,19.3 0 bottom
U$138  [PWR0]  159.26,26.54 0 top
U$139  [#GND#0]  11.94,34.54 90 top
U$140  [#GND#0]  11.94,34.54 90 bottom
U$141  [#SDI#SDA#0]  17.02,34.54 90 top
U$142  [#SDI#SDA#0]  17.02,34.54 90 bottom
U$143  [#SCK#SCL#0]  19.56,34.54 90 top
U$144  [#SCK#SCL#0]  19.56,34.54 90 bottom
U$145  [#SDO#ADR#0]  22.1,34.54 90 top
U$146  [#SDO#ADR#0]  22.1,34.54 90 bottom
U$147  [#INT#0]  27.18,34.54 90 top
U$148  [#INT#0]  27.18,34.54 90 bottom
U$149  [#ADR#0]  19.56,50.29 0 bottom
U$150  [PRESSURE0]  19.56,56.9 0 top
U$151  [SENSOR0]  19.56,54.99 0 top
U$152  [BMP3840]  19.56,53.09 0 top
U$153  [#LED#0]  27.81,46.35 0 bottom
U$154  [#3V3#0]  14.48,34.54 90 top
U$155  [#3V3#0]  14.48,34.54 90 bottom
U$156  [##CSB##0]  24.64,34.54 90 top
U$157  [##CSB##0]  24.64,34.54 90 bottom
U$158  [#0X76#0]  25.91,48.64 0 bottom
U$159  [#0X77#0]  13.21,48.64 0 bottom
U$160  [#I2C#0]  19.56,45.21 0 bottom
U$161  [PWR0]  29.72,52.45 0 top
U$162  [#GND#0]  37.85,34.54 90 top
U$163  [#GND#0]  37.85,34.54 90 bottom
U$164  [#SDI#SDA#0]  42.93,34.54 90 top
U$165  [#SDI#SDA#0]  42.93,34.54 90 bottom
U$166  [#SCK#SCL#0]  45.47,34.54 90 top
U$167  [#SCK#SCL#0]  45.47,34.54 90 bottom
U$168  [#SDO#ADR#0]  48.01,34.54 90 top
U$169  [#SDO#ADR#0]  48.01,34.54 90 bottom
U$170  [#INT#0]  53.09,34.54 90 top
U$171  [#INT#0]  53.09,34.54 90 bottom
U$172  [#ADR#0]  45.47,50.29 0 bottom
U$173  [PRESSURE0]  45.47,56.9 0 top
U$174  [SENSOR0]  45.47,54.99 0 top
U$175  [BMP3840]  45.47,53.09 0 top
U$176  [#LED#0]  53.72,46.35 0 bottom
U$177  [#3V3#0]  40.39,34.54 90 top
U$178  [#3V3#0]  40.39,34.54 90 bottom
U$179  [##CSB##0]  50.55,34.54 90 top
U$180  [##CSB##0]  50.55,34.54 90 bottom
U$181  [#0X76#0]  51.82,48.64 0 bottom
U$182  [#0X77#0]  39.12,48.64 0 bottom
U$183  [#I2C#0]  45.47,45.21 0 bottom
U$184  [PWR0]  55.63,52.45 0 top
U$185  [#GND#0]  63.75,34.54 90 top
U$186  [#GND#0]  63.75,34.54 90 bottom
U$187  [#SDI#SDA#0]  68.83,34.54 90 top
U$188  [#SDI#SDA#0]  68.83,34.54 90 bottom
U$189  [#SCK#SCL#0]  71.37,34.54 90 top
U$190  [#SCK#SCL#0]  71.37,34.54 90 bottom
U$191  [#SDO#ADR#0]  73.91,34.54 90 top
U$192  [#SDO#ADR#0]  73.91,34.54 90 bottom
U$193  [#INT#0]  78.99,34.54 90 top
U$194  [#INT#0]  78.99,34.54 90 bottom
U$195  [#ADR#0]  71.37,50.29 0 bottom
U$196  [PRESSURE0]  71.37,56.9 0 top
U$197  [SENSOR0]  71.37,54.99 0 top
U$198  [BMP3840]  71.37,53.09 0 top
U$199  [#LED#0]  79.63,46.35 0 bottom
U$200  [#3V3#0]  66.29,34.54 90 top
U$201  [#3V3#0]  66.29,34.54 90 bottom
U$202  [##CSB##0]  76.45,34.54 90 top
U$203  [##CSB##0]  76.45,34.54 90 bottom
U$204  [#0X76#0]  77.72,48.64 0 bottom
U$205  [#0X77#0]  65.02,48.64 0 bottom
U$206  [#I2C#0]  71.37,45.21 0 bottom
U$207  [PWR0]  81.53,52.45 0 top
U$208  [#GND#0]  89.66,34.54 90 top
U$209  [#GND#0]  89.66,34.54 90 bottom
U$210  [#SDI#SDA#0]  94.74,34.54 90 top
U$211  [#SDI#SDA#0]  94.74,34.54 90 bottom
U$212  [#SCK#SCL#0]  97.28,34.54 90 top
U$213  [#SCK#SCL#0]  97.28,34.54 90 bottom
U$214  [#SDO#ADR#0]  99.82,34.54 90 top
U$215  [#SDO#ADR#0]  99.82,34.54 90 bottom
U$216  [#INT#0]  104.9,34.54 90 top
U$217  [#INT#0]  104.9,34.54 90 bottom
U$218  [#ADR#0]  97.28,50.29 0 bottom
U$219  [PRESSURE0]  97.28,56.9 0 top
U$220  [SENSOR0]  97.28,54.99 0 top
U$221  [BMP3840]  97.28,53.09 0 top
U$222  [#LED#0]  105.54,46.35 0 bottom
U$223  [#3V3#0]  92.2,34.54 90 top
U$224  [#3V3#0]  92.2,34.54 90 bottom
U$225  [##CSB##0]  102.36,34.54 90 top
U$226  [##CSB##0]  102.36,34.54 90 bottom
U$227  [#0X76#0]  103.63,48.64 0 bottom
U$228  [#0X77#0]  90.93,48.64 0 bottom
U$229  [#I2C#0]  97.28,45.21 0 bottom
U$230  [PWR0]  107.44,52.45 0 top
U$231  [#GND#0]  115.57,34.54 90 top
U$232  [#GND#0]  115.57,34.54 90 bottom
U$233  [#SDI#SDA#0]  120.65,34.54 90 top
U$234  [#SDI#SDA#0]  120.65,34.54 90 bottom
U$235  [#SCK#SCL#0]  123.19,34.54 90 top
U$236  [#SCK#SCL#0]  123.19,34.54 90 bottom
U$237  [#SDO#ADR#0]  125.73,34.54 90 top
U$238  [#SDO#ADR#0]  125.73,34.54 90 bottom
U$239  [#INT#0]  130.81,34.54 90 top
U$240  [#INT#0]  130.81,34.54 90 bottom
U$241  [#ADR#0]  123.19,50.29 0 bottom
U$242  [PRESSURE0]  123.19,56.9 0 top
U$243  [SENSOR0]  123.19,54.99 0 top
U$244  [BMP3840]  123.19,53.09 0 top
U$245  [#LED#0]  131.44,46.35 0 bottom
U$246  [#3V3#0]  118.11,34.54 90 top
U$247  [#3V3#0]  118.11,34.54 90 bottom
U$248  [##CSB##0]  128.27,34.54 90 top
U$249  [##CSB##0]  128.27,34.54 90 bottom
U$250  [#0X76#0]  129.54,48.64 0 bottom
U$251  [#0X77#0]  116.84,48.64 0 bottom
U$252  [#I2C#0]  123.19,45.21 0 bottom
U$253  [PWR0]  133.35,52.45 0 top
U$254  [#GND#0]  141.48,34.54 90 top
U$255  [#GND#0]  141.48,34.54 90 bottom
U$256  [#SDI#SDA#0]  146.56,34.54 90 top
U$257  [#SDI#SDA#0]  146.56,34.54 90 bottom
U$258  [#SCK#SCL#0]  149.1,34.54 90 top
U$259  [#SCK#SCL#0]  149.1,34.54 90 bottom
U$260  [#SDO#ADR#0]  151.64,34.54 90 top
U$261  [#SDO#ADR#0]  151.64,34.54 90 bottom
U$262  [#INT#0]  156.72,34.54 90 top
U$263  [#INT#0]  156.72,34.54 90 bottom
U$264  [#ADR#0]  149.1,50.29 0 bottom
U$265  [PRESSURE0]  149.1,56.9 0 top
U$266  [SENSOR0]  149.1,54.99 0 top
U$267  [BMP3840]  149.1,53.09 0 top
U$268  [#LED#0]  157.35,46.35 0 bottom
U$269  [#3V3#0]  144.02,34.54 90 top
U$270  [#3V3#0]  144.02,34.54 90 bottom
U$271  [##CSB##0]  154.18,34.54 90 top
U$272  [##CSB##0]  154.18,34.54 90 bottom
U$273  [#0X76#0]  155.45,48.64 0 bottom
U$274  [#0X77#0]  142.75,48.64 0 bottom
U$275  [#I2C#0]  149.1,45.21 0 bottom
U$276  [PWR0]  159.26,52.45 0 top
U$277  [#GND#0]  11.94,60.45 90 top
U$278  [#GND#0]  11.94,60.45 90 bottom
U$279  [#SDI#SDA#0]  17.02,60.45 90 top
U$280  [#SDI#SDA#0]  17.02,60.45 90 bottom
U$281  [#SCK#SCL#0]  19.56,60.45 90 top
U$282  [#SCK#SCL#0]  19.56,60.45 90 bottom
U$283  [#SDO#ADR#0]  22.1,60.45 90 top
U$284  [#SDO#ADR#0]  22.1,60.45 90 bottom
U$285  [#INT#0]  27.18,60.45 90 top
U$286  [#INT#0]  27.18,60.45 90 bottom
U$287  [#ADR#0]  19.56,76.2 0 bottom
U$288  [PRESSURE0]  19.56,82.8 0 top
U$289  [SENSOR0]  19.56,80.9 0 top
U$290  [BMP3840]  19.56,78.99 0 top
U$291  [#LED#0]  27.81,72.26 0 bottom
U$292  [#3V3#0]  14.48,60.45 90 top
U$293  [#3V3#0]  14.48,60.45 90 bottom
U$294  [##CSB##0]  24.64,60.45 90 top
U$295  [##CSB##0]  24.64,60.45 90 bottom
U$296  [#0X76#0]  25.91,74.55 0 bottom
U$297  [#0X77#0]  13.21,74.55 0 bottom
U$298  [#I2C#0]  19.56,71.12 0 bottom
U$299  [PWR0]  29.72,78.36 0 top
U$300  [#GND#0]  37.85,60.45 90 top
U$301  [#GND#0]  37.85,60.45 90 bottom
U$302  [#SDI#SDA#0]  42.93,60.45 90 top
U$303  [#SDI#SDA#0]  42.93,60.45 90 bottom
U$304  [#SCK#SCL#0]  45.47,60.45 90 top
U$305  [#SCK#SCL#0]  45.47,60.45 90 bottom
U$306  [#SDO#ADR#0]  48.01,60.45 90 top
U$307  [#SDO#ADR#0]  48.01,60.45 90 bottom
U$308  [#INT#0]  53.09,60.45 90 top
U$309  [#INT#0]  53.09,60.45 90 bottom
U$310  [#ADR#0]  45.47,76.2 0 bottom
U$311  [PRESSURE0]  45.47,82.8 0 top
U$312  [SENSOR0]  45.47,80.9 0 top
U$313  [BMP3840]  45.47,78.99 0 top
U$314  [#LED#0]  53.72,72.26 0 bottom
U$315  [#3V3#0]  40.39,60.45 90 top
U$316  [#3V3#0]  40.39,60.45 90 bottom
U$317  [##CSB##0]  50.55,60.45 90 top
U$318  [##CSB##0]  50.55,60.45 90 bottom
U$319  [#0X76#0]  51.82,74.55 0 bottom
U$320  [#0X77#0]  39.12,74.55 0 bottom
U$321  [#I2C#0]  45.47,71.12 0 bottom
U$322  [PWR0]  55.63,78.36 0 top
U$323  [#GND#0]  63.75,60.45 90 top
U$324  [#GND#0]  63.75,60.45 90 bottom
U$325  [#SDI#SDA#0]  68.83,60.45 90 top
U$326  [#SDI#SDA#0]  68.83,60.45 90 bottom
U$327  [#SCK#SCL#0]  71.37,60.45 90 top
U$328  [#SCK#SCL#0]  71.37,60.45 90 bottom
U$329  [#SDO#ADR#0]  73.91,60.45 90 top
U$330  [#SDO#ADR#0]  73.91,60.45 90 bottom
U$331  [#INT#0]  78.99,60.45 90 top
U$332  [#INT#0]  78.99,60.45 90 bottom
U$333  [#ADR#0]  71.37,76.2 0 bottom
U$334  [PRESSURE0]  71.37,82.8 0 top
U$335  [SENSOR0]  71.37,80.9 0 top
U$336  [BMP3840]  71.37,78.99 0 top
U$337  [#LED#0]  79.63,72.26 0 bottom
U$338  [#3V3#0]  66.29,60.45 90 top
U$339  [#3V3#0]  66.29,60.45 90 bottom
U$340  [##CSB##0]  76.45,60.45 90 top
U$341  [##CSB##0]  76.45,60.45 90 bottom
U$342  [#0X76#0]  77.72,74.55 0 bottom
U$343  [#0X77#0]  65.02,74.55 0 bottom
U$344  [#I2C#0]  71.37,71.12 0 bottom
U$345  [PWR0]  81.53,78.36 0 top
U$346  [#GND#0]  89.66,60.45 90 top
U$347  [#GND#0]  89.66,60.45 90 bottom
U$348  [#SDI#SDA#0]  94.74,60.45 90 top
U$349  [#SDI#SDA#0]  94.74,60.45 90 bottom
U$350  [#SCK#SCL#0]  97.28,60.45 90 top
U$351  [#SCK#SCL#0]  97.28,60.45 90 bottom
U$352  [#SDO#ADR#0]  99.82,60.45 90 top
U$353  [#SDO#ADR#0]  99.82,60.45 90 bottom
U$354  [#INT#0]  104.9,60.45 90 top
U$355  [#INT#0]  104.9,60.45 90 bottom
U$356  [#ADR#0]  97.28,76.2 0 bottom
U$357  [PRESSURE0]  97.28,82.8 0 top
U$358  [SENSOR0]  97.28,80.9 0 top
U$359  [BMP3840]  97.28,78.99 0 top
U$360  [#LED#0]  105.54,72.26 0 bottom
U$361  [#3V3#0]  92.2,60.45 90 top
U$362  [#3V3#0]  92.2,60.45 90 bottom
U$363  [##CSB##0]  102.36,60.45 90 top
U$364  [##CSB##0]  102.36,60.45 90 bottom
U$365  [#0X76#0]  103.63,74.55 0 bottom
U$366  [#0X77#0]  90.93,74.55 0 bottom
U$367  [#I2C#0]  97.28,71.12 0 bottom
U$368  [PWR0]  107.44,78.36 0 top
U$369  [#GND#0]  115.57,60.45 90 top
U$370  [#GND#0]  115.57,60.45 90 bottom
U$371  [#SDI#SDA#0]  120.65,60.45 90 top
U$372  [#SDI#SDA#0]  120.65,60.45 90 bottom
U$373  [#SCK#SCL#0]  123.19,60.45 90 top
U$374  [#SCK#SCL#0]  123.19,60.45 90 bottom
U$375  [#SDO#ADR#0]  125.73,60.45 90 top
U$376  [#SDO#ADR#0]  125.73,60.45 90 bottom
U$377  [#INT#0]  130.81,60.45 90 top
U$378  [#INT#0]  130.81,60.45 90 bottom
U$379  [#ADR#0]  123.19,76.2 0 bottom
U$380  [PRESSURE0]  123.19,82.8 0 top
U$381  [SENSOR0]  123.19,80.9 0 top
U$382  [BMP3840]  123.19,78.99 0 top
U$383  [#LED#0]  131.44,72.26 0 bottom
U$384  [#3V3#0]  118.11,60.45 90 top
U$385  [#3V3#0]  118.11,60.45 90 bottom
U$386  [##CSB##0]  128.27,60.45 90 top
U$387  [##CSB##0]  128.27,60.45 90 bottom
U$388  [#0X76#0]  129.54,74.55 0 bottom
U$389  [#0X77#0]  116.84,74.55 0 bottom
U$390  [#I2C#0]  123.19,71.12 0 bottom
U$391  [PWR0]  133.35,78.36 0 top
U$392  [#GND#0]  141.48,60.45 90 top
U$393  [#GND#0]  141.48,60.45 90 bottom
U$394  [#SDI#SDA#0]  146.56,60.45 90 top
U$395  [#SDI#SDA#0]  146.56,60.45 90 bottom
U$396  [#SCK#SCL#0]  149.1,60.45 90 top
U$397  [#SCK#SCL#0]  149.1,60.45 90 bottom
U$398  [#SDO#ADR#0]  151.64,60.45 90 top
U$399  [#SDO#ADR#0]  151.64,60.45 90 bottom
U$400  [#INT#0]  156.72,60.45 90 top
U$401  [#INT#0]  156.72,60.45 90 bottom
U$402  [#ADR#0]  149.1,76.2 0 bottom
U$403  [PRESSURE0]  149.1,82.8 0 top
U$404  [SENSOR0]  149.1,80.9 0 top
U$405  [BMP3840]  149.1,78.99 0 top
U$406  [#LED#0]  157.35,72.26 0 bottom
U$407  [#3V3#0]  144.02,60.45 90 top
U$408  [#3V3#0]  144.02,60.45 90 bottom
U$409  [##CSB##0]  154.18,60.45 90 top
U$410  [##CSB##0]  154.18,60.45 90 bottom
U$411  [#0X76#0]  155.45,74.55 0 bottom
U$412  [#0X77#0]  142.75,74.55 0 bottom
U$413  [#I2C#0]  149.1,71.12 0 bottom
U$414  [PWR0]  159.26,78.36 0 top
U$415  [#GND#0]  11.94,86.36 90 top
U$416  [#GND#0]  11.94,86.36 90 bottom
U$417  [#SDI#SDA#0]  17.02,86.36 90 top
U$418  [#SDI#SDA#0]  17.02,86.36 90 bottom
U$419  [#SCK#SCL#0]  19.56,86.36 90 top
U$420  [#SCK#SCL#0]  19.56,86.36 90 bottom
U$421  [#SDO#ADR#0]  22.1,86.36 90 top
U$422  [#SDO#ADR#0]  22.1,86.36 90 bottom
U$423  [#INT#0]  27.18,86.36 90 top
U$424  [#INT#0]  27.18,86.36 90 bottom
U$425  [#ADR#0]  19.56,102.11 0 bottom
U$426  [PRESSURE0]  19.56,108.71 0 top
U$427  [SENSOR0]  19.56,106.81 0 top
U$428  [BMP3840]  19.56,104.9 0 top
U$429  [#LED#0]  27.81,98.17 0 bottom
U$430  [#3V3#0]  14.48,86.36 90 top
U$431  [#3V3#0]  14.48,86.36 90 bottom
U$432  [##CSB##0]  24.64,86.36 90 top
U$433  [##CSB##0]  24.64,86.36 90 bottom
U$434  [#0X76#0]  25.91,100.46 0 bottom
U$435  [#0X77#0]  13.21,100.46 0 bottom
U$436  [#I2C#0]  19.56,97.03 0 bottom
U$437  [PWR0]  29.72,104.27 0 top
U$438  [#GND#0]  37.85,86.36 90 top
U$439  [#GND#0]  37.85,86.36 90 bottom
U$440  [#SDI#SDA#0]  42.93,86.36 90 top
U$441  [#SDI#SDA#0]  42.93,86.36 90 bottom
U$442  [#SCK#SCL#0]  45.47,86.36 90 top
U$443  [#SCK#SCL#0]  45.47,86.36 90 bottom
U$444  [#SDO#ADR#0]  48.01,86.36 90 top
U$445  [#SDO#ADR#0]  48.01,86.36 90 bottom
U$446  [#INT#0]  53.09,86.36 90 top
U$447  [#INT#0]  53.09,86.36 90 bottom
U$448  [#ADR#0]  45.47,102.11 0 bottom
U$449  [PRESSURE0]  45.47,108.71 0 top
U$450  [SENSOR0]  45.47,106.81 0 top
U$451  [BMP3840]  45.47,104.9 0 top
U$452  [#LED#0]  53.72,98.17 0 bottom
U$453  [#3V3#0]  40.39,86.36 90 top
U$454  [#3V3#0]  40.39,86.36 90 bottom
U$455  [##CSB##0]  50.55,86.36 90 top
U$456  [##CSB##0]  50.55,86.36 90 bottom
U$457  [#0X76#0]  51.82,100.46 0 bottom
U$458  [#0X77#0]  39.12,100.46 0 bottom
U$459  [#I2C#0]  45.47,97.03 0 bottom
U$460  [PWR0]  55.63,104.27 0 top
U$461  [#GND#0]  63.75,86.36 90 top
U$462  [#GND#0]  63.75,86.36 90 bottom
U$463  [#SDI#SDA#0]  68.83,86.36 90 top
U$464  [#SDI#SDA#0]  68.83,86.36 90 bottom
U$465  [#SCK#SCL#0]  71.37,86.36 90 top